# Allegro board scm.brd
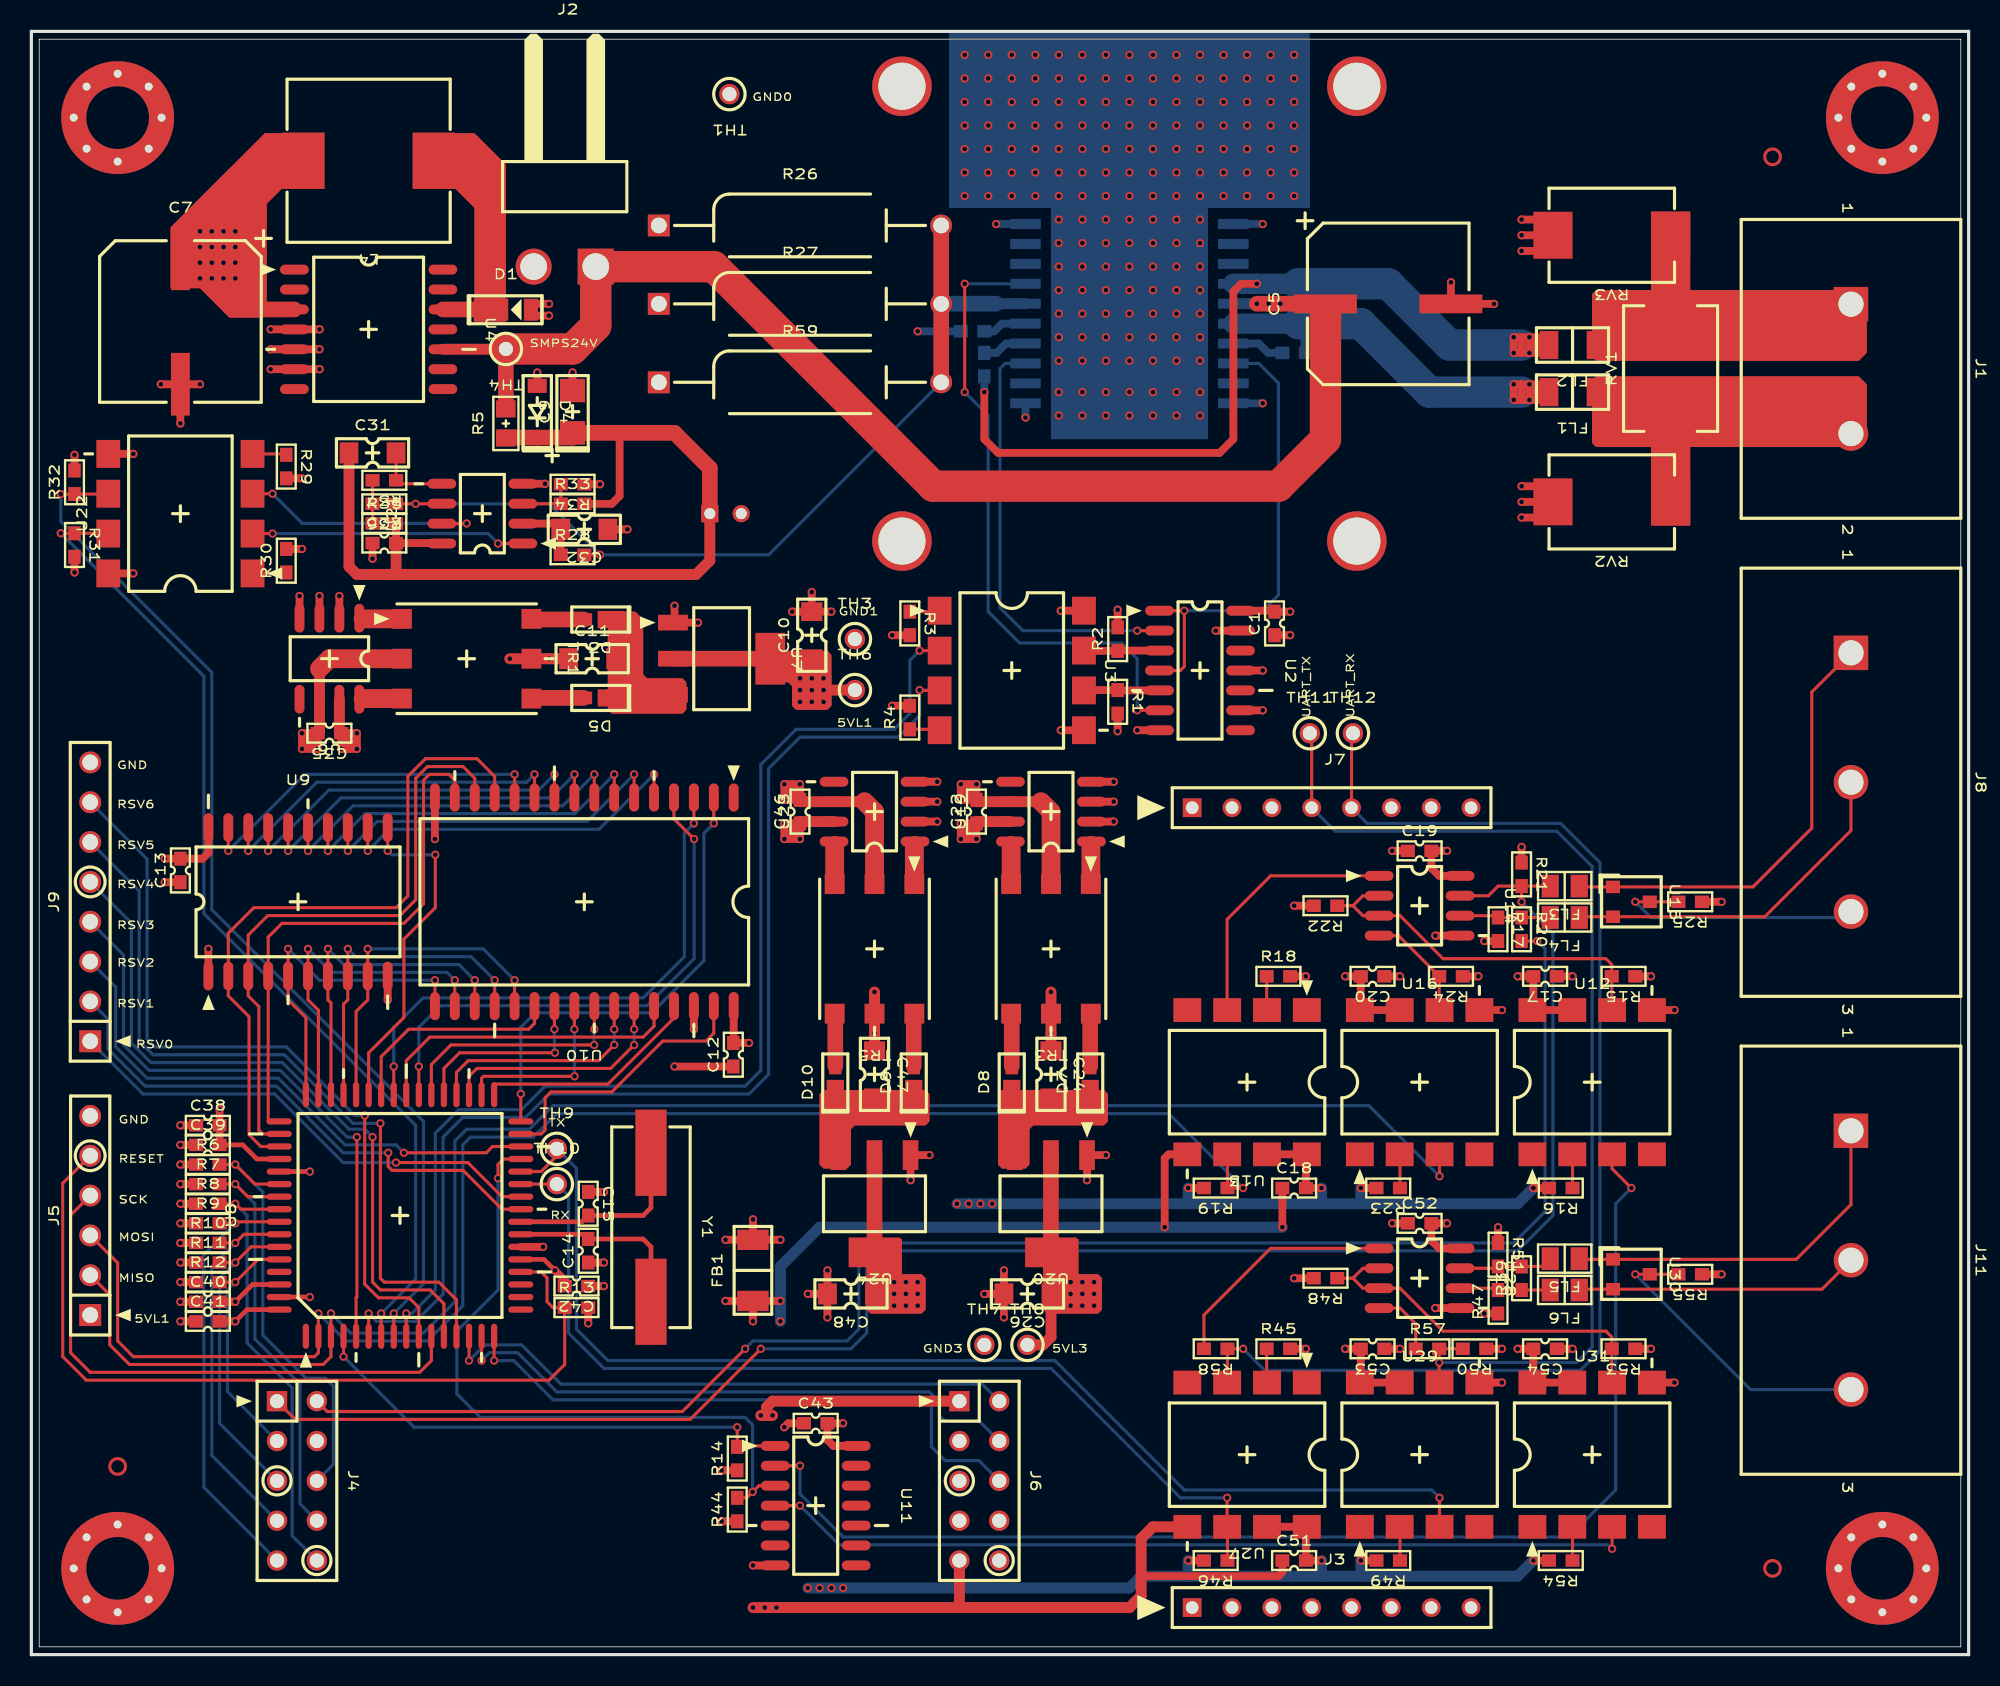
[diagram p0: board, top side]
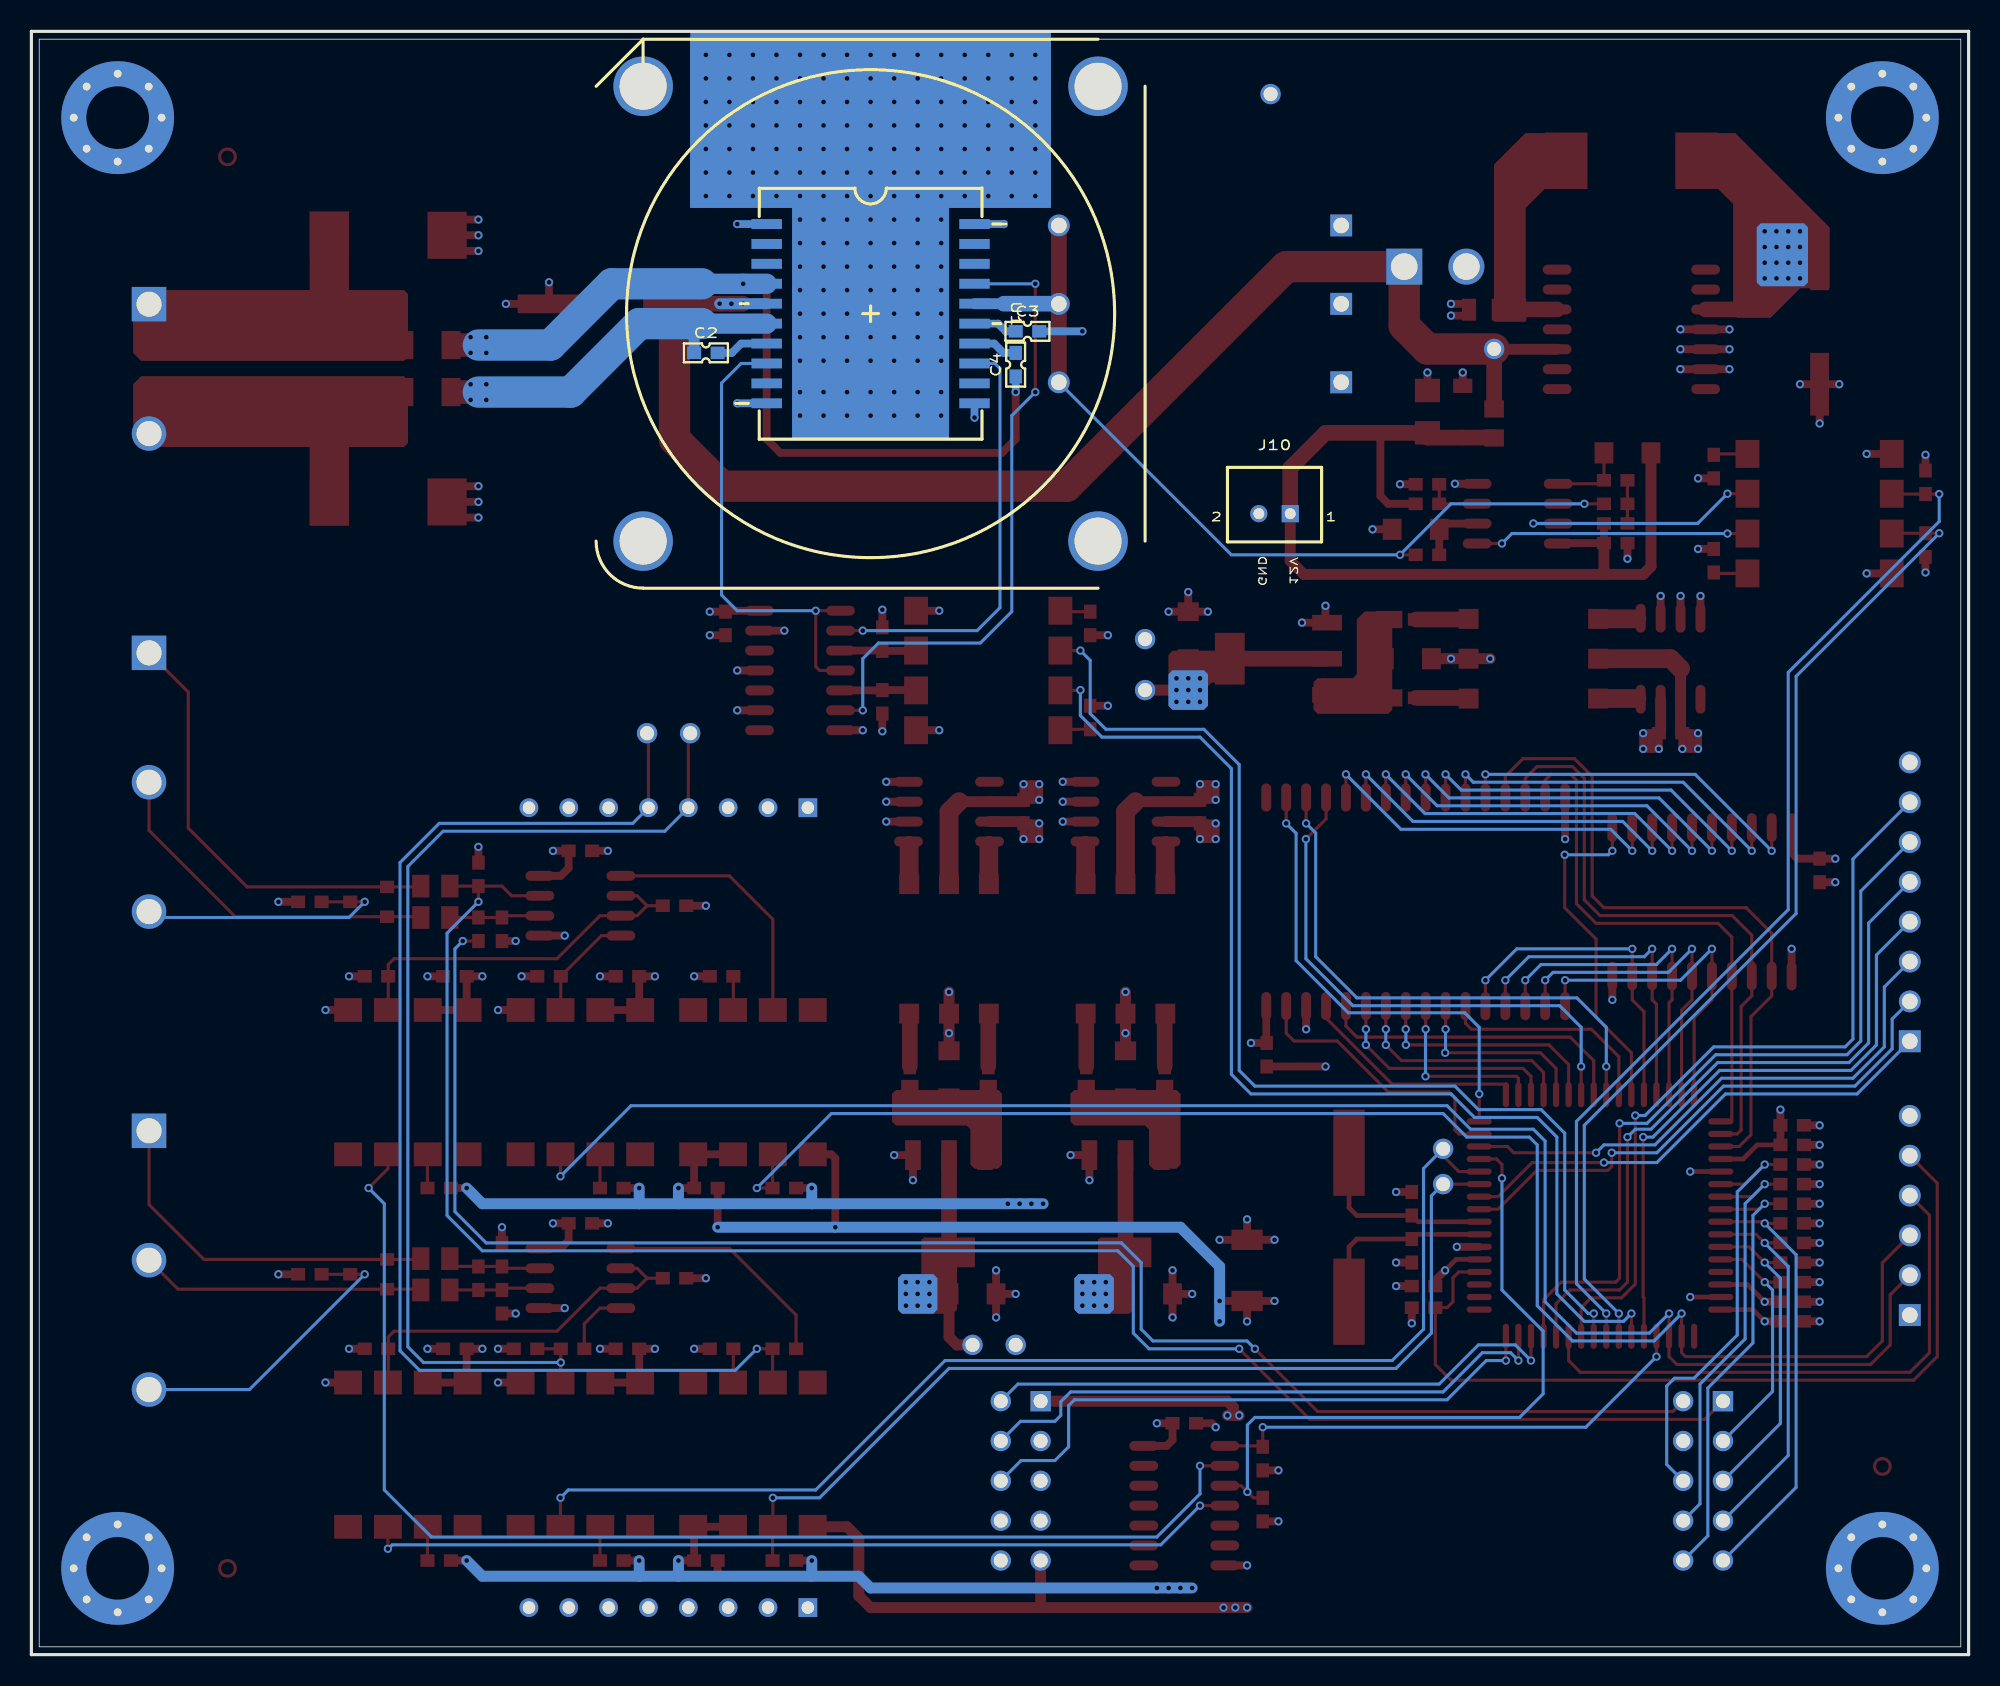
[diagram p1: board, bottom side, seen from below]

Outline 123.5 x 103.5 mm; copper layers: TOP, SIGNAL_2, SIGNAL_3, BOTTOM. Coordinates in mm from the lower left corner of the outline.
Outline path: 0,103.5 0,0 123.5,0 123.5,103.5 0,103.5 ; 0.5,103 123,103 123,0.5 0.5,0.5 0.5,103

## Placement (name value [footprint] x y rotation side)
C1  -  [CC1608]  79.25 65.75 90 top
C2  -  [CC1608]  80.5 83 180 bottom
C3  -  [CC1608]  60 84.38 180 bottom
C4  -  [CC1608]  60.75 82.25 90 bottom
C5  -  [CAP10D]  86.5 86.12 90 top
C7  -  [CAP10D]  9.5 85 0 top
C9  -  [TC3216]  34.5 79.25 90 top
C10  -  [CC3216]  49.75 65 90 top
C11  -  [CC3216]  35.75 63.5 0 top
C12  -  [CC1608]  44.75 38.25 90 top
C13  -  [CC1608]  9.5 50 90 top
C14  -  [CC1608]  35.5 25.75 90 top
C15  -  [CC1608]  35.5 28.75 270 top
C17  -  [CC1608]  96.5 43.25 180 top
C18  -  [CC1608]  80.5 29.75 0 top
C19  -  [CC1608]  88.5 51.25 0 top
C20  -  [CC1608]  85.5 43.25 180 top
C22  -  [CC1608]  60.25 53.75 90 top
C24  -  [CC3216]  65 37 270 top
C26  -  [CC3216]  63.5 23 180 top
C31  -  [CC3216]  21.75 76.62 0 top
C32  -  [CC3216]  35.25 71.75 180 top
C33  -  [CC1608]  22.5 70.88 0 top
C35  -  [CC1608]  19 58.75 180 top
C38  -  [CC1608]  11.25 33.75 0 top
C39  -  [CC1608]  11.25 32.5 0 top
C40  -  [CC1608]  11.25 22.5 0 top
C41  -  [CC1608]  11.25 21.25 0 top
C42  -  [CC1608]  34.75 23.5 180 top
C43  -  [CC1608]  50 14.75 0 top
C46  -  [CC1608]  49 53.75 90 top
C47  -  [CC3216]  53.75 37 270 top
C48  -  [CC3216]  52.25 23 180 top
C51  -  [CC1608]  80.5 6 0 top
C52  -  [CC1608]  88.5 27.5 0 top
C53  -  [CC1608]  85.5 19.5 180 top
C54  -  [CC1608]  96.5 19.5 180 top
D1  -  [POWERDI123]  30.25 85.75 0 top
D3  -  [MICROSMP]  36.25 66 180 top
D4  -  [SOD-123]  32.25 79.25 270 top
D5  -  [MICROSMP]  36.25 61 180 top
D7  -  [MICROSMP]  67.5 36.5 90 top
D8  -  [MICROSMP]  62.5 36.5 90 top
D9  -  [MICROSMP]  56.25 36.5 90 top
D10  -  [MICROSMP]  51.25 36.5 90 top
FB1  -  [BEAD4516]  46 24.5 90 top
FL1  -  [BEAD3216]  98.25 80.5 180 top
FL2  -  [BEAD3216]  98.25 83.5 180 top
FL3  -  [BEAD2012]  97.75 49 180 top
FL4  -  [BEAD2012]  97.75 47 180 top
FL5  -  [BEAD2012]  97.75 25.25 180 top
FL6  -  [BEAD2012]  97.75 23.25 180 top
J1  -  [OSTYK41202030]  116 81.98 270 top
J2  -  [A3961-WR02]  34 88.5 0 top
J3  -  [76341-308LF]  74 3 0 top
J4  -  [76342-305LF]  16.93 11.08 270 top
J5  -  [HEADER6_2_5MM_S]  3.75 28 90 top
J6  -  [76342-305LF]  60.43 11.08 270 top
J7  -  [76341-308LF]  74 54 0 top
J8  -  [OSTYK41203030]  116 55.62 270 top
J9  -  [HEADER8]  3.75 48 90 top
J10  -  [A2001-WV02]  44.25 72.75 180 bottom
J11  -  [OSTYK41203030]  116 25.15 270 top
L4  -  [B82464A4]  21.5 95.25 180 top
MH1  -  [MHOLE3_0]  5.5 98 0 top
MH2  -  [MHOLE3_0]  118 98 0 top
MH3  -  [MHOLE3_0]  5.5 5.5 0 top
MH4  -  [MHOLE3_0]  118 5.5 0 top
NOREF  -  []  5.5 12 0 top
NOREF#2  -  []  111 95.5 0 top
NOREF#3  -  []  111 5.5 0 top
R1  -  [RC1608]  69.25 60.75 270 top
R2  -  [RC1608]  69.25 64.75 90 top
R3  -  [RC1608]  56 65.75 270 top
R4  -  [RC1608]  56 59.75 90 top
R5  -  [RC2012]  30.25 78.5 90 top
R6  -  [RC1608]  11.25 31.25 0 top
R7  -  [RC1608]  11.25 30 0 top
R8  -  [RC1608]  11.25 28.75 0 top
R9  -  [RC1608]  11.25 27.5 0 top
R10  -  [RC1608]  11.25 26.25 0 top
R11  -  [RC1608]  11.25 25 0 top
R12  -  [RC1608]  11.25 23.75 0 top
R13  -  [RC1608]  34.75 22.12 0 top
R14  -  [RC1608]  45 12.5 90 top
R15  -  [RC1608]  101.5 43.25 180 top
R16  -  [RC1608]  97.5 29.75 180 top
R17  -  [RC1608]  93.5 46.25 270 top
R18  -  [RC1608]  79.5 43.25 0 top
R19  -  [RC1608]  75.5 29.75 180 top
R20  -  [RC1608]  95 46.25 270 top
R21  -  [RC1608]  95 49.75 270 top
R22  -  [RC1608]  82.5 47.75 180 top
R23  -  [RC1608]  86.5 29.75 180 top
R24  -  [RC1608]  90.5 43.25 180 top
R25  -  [RC1608]  105.75 48 180 top
R26  -  [MOR-1W]  49 91.12 0 top
R27  -  [MOR-1W]  49 86.12 0 top
R28  -  [RC1608]  34.5 70.12 0 top
R29  -  [RC1608]  16.25 75.75 270 top
R30  -  [RC1608]  16.25 69.75 90 top
R31  -  [RC1608]  2.75 70.75 270 top
R32  -  [RC1608]  2.75 74.75 90 top
R33  -  [RC1608]  34.5 73.38 0 top
R34  -  [RC1608]  34.5 74.62 180 top
R35  -  [RC1608]  22.5 72.12 0 top
R36  -  [RC1608]  22.5 73.38 180 top
R37  -  [RC1608]  22.5 74.88 180 top
R39  -  [RC1608]  95 24 90 top
R44  -  [RC1608]  45 9.25 90 top
R45  -  [RC1608]  79.5 19.5 0 top
R46  -  [RC1608]  75.5 6 180 top
R47  -  [RC1608]  93.5 22.5 90 top
R48  -  [RC1608]  82.5 24 180 top
R49  -  [RC1608]  86.5 6 180 top
R50  -  [RC1608]  92 19.5 180 top
R51  -  [RC1608]  93.5 25.5 270 top
R53  -  [RC1608]  101.5 19.5 180 top
R54  -  [RC1608]  97.5 6 180 top
R55  -  [RC1608]  105.75 24.25 180 top
R57  -  [RC1608]  89 19.5 0 top
R58  -  [RC1608]  75.5 19.5 180 top
R59  -  [MOR-1W]  49 81.12 0 top
RV1  -  [ERZVF2M]  104.5 82 90 top
RV2  -  [ERZVF2M]  100.75 73.5 180 top
RV3  -  [ERZVF2M]  100.75 90.5 180 top
TH1  -  [TP0_9]  44.5 99.5 180 top
TH3  -  [TP0_9]  52.5 64.75 0 top
TH4  -  [TP0_9]  30.25 83.25 180 top
TH6  -  [TP0_9]  52.5 61.5 0 top
TH7  -  [TP0_9]  60.75 19.75 0 top
TH8  -  [TP0_9]  63.5 19.75 0 top
TH9  -  [TP0_9]  33.5 32.25 0 top
TH10  -  [TP0_9]  33.5 30 0 top
TH11  -  [TP0_9]  81.5 58.75 0 top
TH12  -  [TP0_9]  84.25 58.75 0 top
TR1  -  [Q4470-CL]  27.75 63.5 270 top
TR3  -  [Q4470-CL]  65 45 180 top
TR5  -  [Q4470-CL]  53.75 45 180 top
U1  -  [POWERSO20]  70 85.5 270 bottom
U2  -  [SOP14_3_9_6_1_27]  74.5 62.75 270 top
U3  -  [SMD-8]  62.5 62.75 270 top
U4  -  [SOP14_7_5_10_3_1_27]  21.5 84.5 270 top
U6  -  [SOP8_3_9_6_1_27]  19 63.5 180 top
U7  -  [SOT-223]  44 63.5 270 top
U8  -  [QFP64_14_16_0_8]  23.5 28 90 top
U9  -  [SOP20_7_5_10_3_1_27]  17 48 0 top
U10  -  [SOP32_11_4_14_1_1_27]  35.25 48 180 top
U11  -  [SOP14_3_9_6_1_27]  50 9.5 270 top
U12  -  [SMD-8]  99.5 36.5 0 top
U13  -  [SMD-8]  77.5 36.5 180 top
U14  -  [SOP8_3_9_6_1_27]  88.5 47.75 270 top
U15  -  [SOT-23]  102 48 270 top
U16  -  [SMD-8]  88.5 36.5 0 top
U19  -  [SOP8_3_9_6_1_27]  65 53.75 90 top
U20  -  [SOT-223]  65 28.75 180 top
U21  -  [SOP8_3_9_6_1_27]  28.75 72.75 90 top
U22  -  [SMD-8]  9.5 72.75 90 top
U23  -  [SOP8_3_9_6_1_27]  53.75 53.75 90 top
U24  -  [SOT-223]  53.75 28.75 180 top
U27  -  [SMD-8]  77.5 12.75 180 top
U28  -  [SOP8_3_9_6_1_27]  88.5 24 270 top
U29  -  [SMD-8]  88.5 12.75 0 top
U30  -  [SOT-23]  102 24.25 270 top
U31  -  [SMD-8]  99.5 12.75 0 top
U32  -  [FAN35MM]  70 85.5 180 bottom
Y1  -  [SX-1]  39.5 27.25 270 top

## Library data of the parts
C1 C12 C13 C17-C20 C22 C33 C35 C38-C43 C46 C51-C54 = 0_1U_0603: alternate symbols: (B:CC1608_ALT)
C2 C4 = 10N_0603: alternate symbols: (B:CC1608_ALT)
C3 = 220N_0603: alternate symbols: (B:CC1608_ALT)
C5 C7 = EEE-1VA331P: alternate symbols: (B:CAP10D_ALT)
C9 = TANTAL_6_8UF_3216: alternate symbols: (B:TC3216_ALT)
C10 C11 C24 C26 C32 C47 C48 = 10U_1206: alternate symbols: (B:CC3216_ALT)
C14 C15 = 15P_0603: alternate symbols: (B:CC1608_ALT)
C31 = TCSCS1C685MAAR: alternate symbols: (B:CC3216_ALT)
D1 = DFLS160-7: alternate symbols: (B:POWERDI123_ALT)
D3 D5 D7-D10 = MSS1P2L-M3_89A: alternate symbols: (B:MICROSMP_ALT)
D4 = MMSZ4699T1G_12V: alternate symbols: (B:SOD-123_ALT)
FB1 = BLM41PG750SN1_DNI: alternate symbols: (B:BEAD4516_ALT)
FL1 FL2 = BLM31PG601SN1L: alternate symbols: (B:BEAD3216_ALT)
FL3-FL6 = MMZ2012R150A: alternate symbols: (B:BEAD2012_ALT)
J1 = OSTYK41202030: alternate symbols: (B:OSTYK41202030_ALT)
J2 = 09-65-2028: alternate symbols: (B:A3961-WR02_ALT)
J3 J7 = 76341-308LF_2_54MM_SOCKET: alternate symbols: (B:76341-308LF_ALT)
J4 J6 = 76342-305LF: alternate symbols: (B:76342-305LF_ALT)
J5 = PH01_2_54_-SS40P-11_5MM: alternate symbols: (B:HEADER6_2_5MM_S_ALT)
J8 J11 = OSTYK41203030: alternate symbols: (B:OSTYK41203030_ALT)
J9 = HEADER_2_54MM_DNI: alternate symbols: (B:HEADER8_ALT)
J10 = A2001-WV02_PITCH_2MM: alternate symbols: (B:A2001-WV02_ALT)
L4 = B82464A4474K: alternate symbols: (B:B82464A4_ALT)
MH1-MH4 = HOLE_MOUNT: alternate symbols: (B:MHOLE3_0_ALT)
R1 R2 R15 R17 R19 R21 R22 R24 R31 R32 R46-R48 R50 R51 R53 = 4_7K_0603: alternate symbols: (B:RC1608_ALT)
R3 R4 R16 R18 R23 R29 R30 R45 R49 R54 = 470_0603: alternate symbols: (B:RC1608_ALT)
R5 = 2_7K_0805: alternate symbols: (B:RC2012_ALT)
R6-R14 R28 R37 R44 = 10K_0603: alternate symbols: (B:RC1608_ALT)
R20 R39 = 120_0603: alternate symbols: (B:RC1608_ALT)
R25 R55 R57 R58 = 0_0603: alternate symbols: (B:RC1608_ALT)
R26 R27 R59 = MOR_1W_5__1OHM: alternate symbols: (B:MOR-1W_ALT)
R33 = 16K_0603: alternate symbols: (B:RC1608_ALT)
R34 = 1K_0603: alternate symbols: (B:RC1608_ALT)
R35 = 47K_0603: alternate symbols: (B:RC1608_ALT)
R36 = 200_0603: alternate symbols: (B:RC1608_ALT)
RV1-RV3 = ERZVF2M470: alternate symbols: (B:ERZVF2M_ALT)
TH1 TH3 TH7 = GND: alternate symbols: (B:TP0_9_ALT)
TH4 = SMPS24V: alternate symbols: (B:TP0_9_ALT)
TH6 = 5VL1: alternate symbols: (B:TP0_9_ALT)
TH8 = 5VL3: alternate symbols: (B:TP0_9_ALT)
TH9 TH11 = TX: alternate symbols: (B:TP0_9_ALT)
TH10 TH12 = RX: alternate symbols: (B:TP0_9_ALT)
TR1 TR3 TR5 = Q4470-CL: alternate symbols: (B:Q4470-CL_ALT)
U1 = L6201PS_POWERSO20: alternate symbols: (B:POWERSO20_ALT)
U2 U11 = MM74HC04M: alternate symbols: (B:SOP14_3_9_6_1_27_ALT)
U3 U22 = HCPL2630S: alternate symbols: (B:SMD-8_ALT)
U4 = LM2574HVM-5_0: alternate symbols: (B:SOP14_7_5_10_3_1_27_ALT)
U6 U19 U23 = MAX253ESA: alternate symbols: (B:SOP8_3_9_6_1_27_ALT)
U7 U20 U24 = LM1117IMPX-5_0: alternate symbols: (B:SOT-223_ALT)
U8 = ATMEGA128-16AU: alternate symbols: (B:QFP64_14_16_0_8_ALT)
U9 = SN74HC573ADW: alternate symbols: (B:SOP20_7_5_10_3_1_27_ALT)
U10 = R1LP0108ESP-7SI_B0: alternate symbols: (B:SOP32_11_4_14_1_1_27_ALT)
U12 U13 U16 U27 U29 U31 = 6N137S: alternate symbols: (B:SMD-8_ALT)
U14 U28 = SN65176BD: alternate symbols: (B:SOP8_3_9_6_1_27_ALT)
U15 U30 = SM712-TP: alternate symbols: (B:SOT-23_ALT)
U21 = LM2903D_SOIC: alternate symbols: (B:SOP8_3_9_6_1_27_ALT)
U32 = FAN35M: alternate symbols: (B:FAN35MM_ALT)
Y1 = SX-1_8MHZ_: alternate symbols: (B:SX-1_ALT)

## Footprints (pads in the part's own frame, mm; a bottom-side part is the same pattern mirrored in y, then rotated)
76341-308LF
  rect 1.2x1.2 hole 0.8: 1(0,0)
  round 1.2 hole 0.8: 2(2.54,0) 3(5.08,0) 4(7.62,0) 5(10.16,0) 6(12.7,0) 7(15.24,0) 8(17.78,0)
76342-305LF
  rect 1.3x1.3 hole 0.9: 1(-5.08,-1.27)
  round 1.3 hole 0.9: 2(-5.08,1.27) 3(-2.54,-1.27) 4(-2.54,1.27) 5(0,-1.27) 6(0,1.27) 7(2.54,-1.27) 8(2.54,1.27) 9(5.08,-1.27) 10(5.08,1.27)
A2001-WV02
  rect 1.1x1.1 hole 0.7: 1(1,0)
  round 1.1 hole 0.7: 2(-1,0)
A3961-WR02
  rect 2.3x2.3 hole 1.7: 1(1.98,0)
  round 2.3 hole 1.7: 2(-1.98,0)
B82464A4
  rect 2.7x3.6 smd: 1(-4.15,0) 2(4.15,0)
BEAD2012
  rect 1.1x1.45 smd: 1(-0.925,0) 2(0.925,0)
BEAD3216
  rect 1.2x1.8 smd: 1(-1.5,0) 2(1.5,0)
BEAD4516
  rect 1.3x2 smd: 1(-1.95,0) 2(1.95,0)
CAP10D
  rect 1.2x4 smd: 1(0,4) 2(0,-4)
CC1608
  rect 0.9x0.8 smd: 1(-0.75,0) 2(0.75,0)
CC3216
  rect 1.2x1.35 smd: 1(-1.5,0) 2(1.5,0)
ERZVF2M
  rect 2.5x3 smd: 1(-3.75,0) 2(3.75,0)
FAN35MM
  round 3.8 hole 3: 1(-14.5,14.5) 2(14.5,14.5) 3(14.5,-14.5) 4(-14.5,-14.5)
HEADER6_2_5MM_S
  rect 1.4x1.4 hole 1: 1(-6.35,0)
  round 1.4 hole 1: 2(-3.81,0) 3(-1.27,0) 4(1.27,0) 5(3.81,0) 6(6.35,0)
HEADER8
  rect 1.4x1.4 hole 1: 1(-8.89,0)
  round 1.4 hole 1: 2(-6.35,0) 3(-3.81,0) 4(-1.27,0) 5(1.27,0) 6(3.81,0) 7(6.35,0) 8(8.89,0)
MHOLE3_0
  round 0.9 hole 0.5: 1(2.8,0) 2(1.98,1.98) 3(0,2.8) 4(-1.98,1.98) 5(-2.8,0) 6(-1.98,-1.98) 7(0,-2.8) 8(1.98,-1.98)
MICROSMP
  rect 1.7x1.1 smd: 1(-0.7,0)
  rect 1.05x0.8 smd: 2(1.025,0)
MOR-1W
  rect 1.4x1.4 hole 1: 1(-9,0)
  round 1.4 hole 1: 2(9,0)
OSTYK41202030
  rect 2.2x2.2 hole 1.6: 1(-4.125,0)
  round 2.2 hole 1.6: 2(4.125,0)
OSTYK41203030
  rect 2.2x2.2 hole 1.6: 1(-8.25,0)
  round 2.2 hole 1.6: 2(0,0) 3(8.25,0)
POWERDI123
  rect 0.9x1.4 smd: 1(1.6,0)
  rect 2.2x1.4 smd: 2(-0.95,0)
POWERSO20
  rect 0.635x1.95 smd: 1(-5.715,-6.625) 2(-4.445,-6.625) 3(-3.175,-6.625) 4(-1.905,-6.625) 5(-0.635,-6.625) 6(0.635,-6.625) 7(1.905,-6.625) 8(3.175,-6.625) 9(4.445,-6.625) 10(5.715,-6.625) 11(5.715,6.625) 12(4.445,6.625) 13(3.175,6.625) 14(1.905,6.625) 15(0.635,6.625) 16(-0.635,6.625) 17(-1.905,6.625) 18(-3.175,6.625) 19(-4.445,6.625) 20(-5.715,6.625)
Q4470-CL
  rect 1.27x1.27 smd: 1(-2.54,-4.13) 2(0,-4.13) 3(2.54,-4.13) 4(2.54,4.13) 5(0,4.13) 6(-2.54,4.13)
QFP64_14_16_0_8
  oval 1.6x0.4 smd: 1(-7.7,6) 2(-7.7,5.2) 3(-7.7,4.4) 4(-7.7,3.6) 5(-7.7,2.8) 6(-7.7,2) 7(-7.7,1.2) 8(-7.7,0.4) 9(-7.7,-0.4) 10(-7.7,-1.2) 11(-7.7,-2) 12(-7.7,-2.8) 13(-7.7,-3.6) 14(-7.7,-4.4) 15(-7.7,-5.2) 16(-7.7,-6) 33(7.7,-6) 34(7.7,-5.2) 35(7.7,-4.4) 36(7.7,-3.6) 37(7.7,-2.8) 38(7.7,-2) 39(7.7,-1.2) 40(7.7,-0.4) 41(7.7,0.4) 42(7.7,1.2) 43(7.7,2) 44(7.7,2.8) 45(7.7,3.6) 46(7.7,4.4) 47(7.7,5.2) 48(7.7,6)
  oval 0.4x1.6 smd: 17(-6,-7.7) 18(-5.2,-7.7) 19(-4.4,-7.7) 20(-3.6,-7.7) 21(-2.8,-7.7) 22(-2,-7.7) 23(-1.2,-7.7) 24(-0.4,-7.7) 25(0.4,-7.7) 26(1.2,-7.7) 27(2,-7.7) 28(2.8,-7.7) 29(3.6,-7.7) 30(4.4,-7.7) 31(5.2,-7.7) 32(6,-7.7) 49(6,7.7) 50(5.2,7.7) 51(4.4,7.7) 52(3.6,7.7) 53(2.8,7.7) 54(2,7.7) 55(1.2,7.7) 56(0.4,7.7) 57(-0.4,7.7) 58(-1.2,7.7) 59(-2,7.7) 60(-2.8,7.7) 61(-3.6,7.7) 62(-4.4,7.7) 63(-5.2,7.7) 64(-6,7.7)
RC1608
  rect 0.9x0.8 smd: 1(-0.75,0) 2(0.75,0)
RC2012
  rect 1.1x1.25 smd: 1(-0.925,0) 2(0.925,0)
SMD-8
  rect 1.78x1.52 smd: 1(-3.81,-4.6) 2(-1.27,-4.6) 3(1.27,-4.6) 4(3.81,-4.6) 5(3.81,4.6) 6(1.27,4.6) 7(-1.27,4.6) 8(-3.81,4.6)
SOD-123
  rect 0.91x1.22 smd: 1(-1.65,0) 2(1.65,0)
SOP8_3_9_6_1_27
  oval 0.635x1.835 smd: 1(-1.905,-2.583) 2(-0.635,-2.583) 3(0.635,-2.583) 4(1.905,-2.583) 5(1.905,2.583) 6(0.635,2.583) 7(-0.635,2.583) 8(-1.905,2.583)
SOP14_3_9_6_1_27
  oval 0.635x1.835 smd: 1(-3.81,-2.583) 2(-2.54,-2.583) 3(-1.27,-2.583) 4(0,-2.583) 5(1.27,-2.583) 6(2.54,-2.583) 7(3.81,-2.583) 8(3.81,2.583) 9(2.54,2.583) 10(1.27,2.583) 11(0,2.583) 12(-1.27,2.583) 13(-2.54,2.583) 14(-3.81,2.583)
SOP14_7_5_10_3_1_27
  oval 0.635x1.835 smd: 1(-3.81,-4.732) 2(-2.54,-4.732) 3(-1.27,-4.732) 4(0,-4.732) 5(1.27,-4.732) 6(2.54,-4.732) 7(3.81,-4.732) 8(3.81,4.732) 9(2.54,4.732) 10(1.27,4.732) 11(0,4.732) 12(-1.27,4.732) 13(-2.54,4.732) 14(-3.81,4.732)
SOP20_7_5_10_3_1_27
  oval 0.635x1.835 smd: 1(-5.715,-4.732) 2(-4.445,-4.732) 3(-3.175,-4.732) 4(-1.905,-4.732) 5(-0.635,-4.732) 6(0.635,-4.732) 7(1.905,-4.732) 8(3.175,-4.732) 9(4.445,-4.732) 10(5.715,-4.732) 11(5.715,4.732) 12(4.445,4.732) 13(3.175,4.732) 14(1.905,4.732) 15(0.635,4.732) 16(-0.635,4.732) 17(-1.905,4.732) 18(-3.175,4.732) 19(-4.445,4.732) 20(-5.715,4.732)
SOP32_11_4_14_1_1_27
  oval 0.635x1.8 smd: 1(-9.525,-6.65) 2(-8.255,-6.65) 3(-6.985,-6.65) 4(-5.715,-6.65) 5(-4.445,-6.65) 6(-3.175,-6.65) 7(-1.905,-6.65) 8(-0.635,-6.65) 9(0.635,-6.65) 10(1.905,-6.65) 11(3.175,-6.65) 12(4.445,-6.65) 13(5.715,-6.65) 14(6.985,-6.65) 15(8.255,-6.65) 16(9.525,-6.65) 17(9.525,6.65) 18(8.255,6.65) 19(6.985,6.65) 20(5.715,6.65) 21(4.445,6.65) 22(3.175,6.65) 23(1.905,6.65) 24(0.635,6.65) 25(-0.635,6.65) 26(-1.905,6.65) 27(-3.175,6.65) 28(-4.445,6.65) 29(-5.715,6.65) 30(-6.985,6.65) 31(-8.255,6.65) 32(-9.525,6.65)
SOT-23
  rect 0.8x0.9 smd: 1(-0.95,-1.175) 2(0.95,-1.175) 3(0,1.175)
SOT-223
  rect 1x1.9 smd: 1(-2.3,-3.1) 2(0,-3.1) 3(2.3,-3.1)
  rect 3.3x1.9 smd: 4(0,3.1)
SX-1
  rect 5.5x2 smd: 1(-4.75,0) 2(4.75,0)
TC3216
  rect 1.5x1.6 smd: 1(-1.35,0) 2(1.35,0)
TP0_9
  round 1.3 hole 0.9: 1(0,0)

## Nets
5VL1: C10.1 C12.2 C13.2 C18.2 C38.2 C39.2 C40.2 C41.2 C42.2 C43.2 C51.2 J5.1 J6.1 R3.2 R4.2 R6.1 R7.1 R8.1 R9.1 R10.1 R11.1 R12.1 R13.2 R16.2 R19.2 R23.2 R31.2 R32.2 R46.2 R49.2 R54.2 TH6.1 U7.2 U7.4 U8.21 U8.52 U8.62 U8.64 U9.20 U10.30 U10.32 U11.14 U13.7 U13.8 U22.8 U27.7 U27.8
5VL2: C48.1 C52.2 C53.2 C54.2 J3.3 J3.4 J3.5 R45.2 R47.1 R48.2 R50.1 R53.1 U24.2 U24.4 U28.8 U29.7 U29.8 U31.7 U31.8
5VL3: C17.2 C19.2 C20.2 C26.1 R15.1 R17.2 R18.2 R22.2 R24.1 TH8.1 U12.7 U12.8 U14.8 U16.7 U16.8 U20.2 U20.4
5VM: C1.2 C7.1 C22.2 C35.2 C46.2 L4.2 R1.2 R2.2 R29.2 R30.2 TR1.2 TR3.2 TR5.2 U2.14 U3.8 U4.3 U6.6 U19.6 U23.6
12VM: C9.1 C31.1 C33.2 D4.2 J10.1 R5.1 R33.2 R35.2 U21.8
0: C1.1 C3.2 C5.2 C7.2 C9.2 C22.1 C32.1 C33.1 C35.1 C46.1 D1.1 D4.1 J2.2 J10.2 R26.1 R27.1 R34.1 R59.1 RV2.2 RV3.2 TH1.1 U1.1 U1.10 U1.11 U1.20 U2.7 U2.9 U2.11 U2.13 U3.5 U4.4 U4.5 U4.6 U6.2 U6.3 U6.4 U6.7 U19.2 U19.3 U19.4 U19.7 U21.4 U23.2 U23.3 U23.4 U23.7
1: C10.2 C11.1 C12.1 C13.1 C14.1 C15.1 C18.1 C38.1 C39.1 C40.1 C41.1 C42.1 C43.1 C51.1 FB1.1 J5.6 J6.9 J9.8 R14.1 R44.1 TH3.1 TR1.5 U7.1 U8.22 U8.53 U8.63 U9.1 U9.10 U10.16 U11.7 U13.5 U22.5 U27.5
2: C47.1 C48.2 C52.1 C53.1 C54.1 FB1.2 J3.1 J3.2 J3.6 J7.1 J7.2 J7.3 J7.6 R51.1 R55.1 TR5.5 U24.1 U28.5 U29.5 U31.5
3: C17.1 C19.1 C20.1 C24.1 C26.2 R21.1 R25.1 TH7.1 TR3.5 U12.5 U14.5 U16.5 U20.1
485_EN_LOCAL: R44.2 U8.29 U11.3
485_EN_MASTER: R14.2 U8.4 U11.1
485_RX_LOCAL: R58.2 U28.1
485_RX_MASTER: J5.3 R19.1 U8.2 U13.6
485_TERM_N: FL3.2 J4.1 R21.2 U14.7
485_TERM_P: J4.2 R20.2
485_TX_LOCAL: R57.1 U28.4
485_TX_MASTER: J5.2 U8.3 U16.3
A8: U8.35 U10.27
A9: U8.36 U10.26
A10: U8.37 U10.23
A11: U8.38 U10.25
A12: U8.39 U10.4
A13: U8.40 U10.28
A14: U8.41 U10.3
A15: U8.42 U10.22
CURRENT_SEN: R31.1 U8.7 U22.7
D0: U8.51 U9.2 U10.13
D1: U8.50 U9.3 U10.14
D2: U8.49 U9.4 U10.15
D3: U8.48 U9.5 U10.17
D4: U8.47 U9.6 U10.18
D5: U8.46 U9.7 U10.19
D6: U8.45 U9.8 U10.20
D7: U8.44 U9.9 U10.21
PLC_EN: U3.3 U8.6
PLC_RX: R32.1 U8.8 U22.6
PLC_TX: U3.2 U8.9
RESERVED0: J9.1 U8.26
RESERVED1: J9.2 U8.25
RESERVED2: J9.3 U8.30
RESERVED3: J9.4 U8.5
RESERVED4: J9.5 U8.12
RESERVED5: J9.6 U8.13
RESERVED6: J9.7 U8.10
RX: R46.1 TH10.1 U8.27 U27.6
SMPS24V: C5.1 J2.1 R5.2 TH4.1 U1.5 U4.10
TX: TH9.1 U8.28 U29.3
UART_RX: J7.5 R58.1 TH12.1 U27.3
UART_TX: J7.4 R50.2 R57.2 TH11.1 U29.6
N09389: D3.2 TR1.6
N09392: D5.2 TR1.4
N09528: C11.2 D3.1 D5.1 U7.3
N35390: U9.19 U10.12
N35393: U9.18 U10.11
N35399: U9.17 U10.10
N35402: U9.16 U10.9
N35405: U9.15 U10.8
N35408: U9.14 U10.7
N35411: U9.13 U10.6
N35414: U9.12 U10.5
N35443: U8.43 U9.11
N35464: U8.31 U10.31
N38547: U8.33 U10.29
N38727: U8.34 U10.24
N39169: U8.32 U10.2
N10841551: FL2.1 J1.1 RV1.2 RV3.1
N10842146: FL1.1 J1.2 RV1.1 RV2.1
N10844937: C2.1 FL1.2 U1.6
N10844940: C4.1 FL2.2 U1.4
N10846204: U1.8 U2.1 U2.4
N10847524: C2.2 U1.7
N10847531: C4.2 U1.14
N10852000: R1.1 U2.5 U3.6
N10855610: U1.13 U2.2
N10855613: U1.17 U2.6
N10855616: C3.1 U1.15
N10857224: D1.2 L4.1 U4.12
N10865568: R2.1 U2.3 U3.7
N10867072: R3.1 U3.1
N10870573: TR1.1 U6.1
N10870576: TR1.3 U6.8
N10877738: C14.2 U8.23 Y1.2
N10877750: C15.2 U8.24 Y1.1
N10878472: J5.5 R13.1 U8.20
N10878665: J5.4 U8.11
N10882240: D8.2 TR3.4
N10882264: C24.2 D7.1 D8.1 U20.3
N10882308: TR3.3 U19.8
N10882312: D7.2 TR3.6
N10882400: TR3.1 U19.1
N10895652: R24.2 U14.4 U16.6
N10895660: U13.3 U14.1
N10895700: R18.1 U13.2
N10895720: R15.2 R22.1 U12.6 U14.2 U14.3
N10895736: R23.1 U16.2
N10895740: J8.3 R25.2 U15.3
N10895768: FL4.2 R17.1 R20.1 U14.6
N10895776: FL3.1 J8.1 U15.1
N10895804: FL4.1 J8.2 U15.2
N10895892: R16.1 U12.2
N10899790: U11.2 U12.3
N10905190: J6.2 U8.14
N10905845: J6.4 U8.15
N10905855: J6.6 U8.16
N10912524: J4.3 R12.2 U8.60
N10912530: J4.5 R11.2 U8.59
N10912536: J4.7 R10.2 U8.58
N10912542: J4.9 R9.2 U8.57
N10912548: J4.10 R8.2 U8.56
N10912554: J4.8 R7.2 U8.55
N10912561: J4.6 R6.2 U8.54
N10952342: R4.1 U3.4
N11012209: U21.7 U22.3
N11012213: R29.1 U22.4
N11012385: R30.1 U22.1
N11012421: U21.1 U22.2
N11012477: R33.1 R34.2 U21.3
N11012557: R26.2 R27.2 R28.2 R36.1 R59.2 U1.16 U21.6
N11012561: C31.2 R37.1 U21.5
N11012633: R35.1 R36.2 R37.2
N11012693: C32.2 R28.1 U21.2
N11053368: U11.4 U31.3
N11053516: R48.1 R53.2 U28.2 U28.3 U31.6
N11053708: R45.1 U27.2
N11053936: R49.1 U29.2
N11054044: R54.1 U31.2
N11062693: D10.2 TR5.4
N11062701: C47.2 D9.1 D10.1 U24.3
N11062785: D9.2 TR5.6
N11062789: TR5.3 U23.8
N11062917: TR5.1 U23.1
N11075966: FL5.1 J11.1 U30.1
N11075998: J11.3 R55.2 U30.3
N11076018: FL6.2 R39.1 R47.2 U28.6
N11076244: FL6.1 J11.2 U30.2
N11076282: FL5.2 R39.2 R51.2 U28.7

Pads without a net: J3 7 8; J4 4; J6 3 5 7 8 10; J7 7 8; MH1 1 2 3 4 5 6 7 8; MH2 1 2 3 4 5 6 7 8; MH3 1 2 3 4 5 6 7 8; MH4 1 2 3 4 5 6 7 8; U1 2 3 9 12 18 19; U2 8 10 12; U4 1 2 7 8 9 11 13 14; U6 5; U8 1 17 18 19 61; U10 1; U11 5 6 8 9 10 11 12 13; U12 1 4; U13 1 4; U16 1 4; U19 5; U23 5; U27 1 4; U29 1 4; U31 1 4; U32 1 2 3 4

## Via types
v1: diameter 0.53, hole 0.3, TOP to BOTTOM, 519 vias

## Routing (per net, layer and track width the routed paths; a pad name or vN(x,y) marks a point on that pad's centre or on a via; arc(x,y) is an arc through that point)
5VL1: length 177.9
  TOP w0.3: U8.62 14.1,23.6 v1(13,22.5) ; U8.52 14.38,31.6 13.47,32.5 C39.2 ; v1(13,21.25) 13.75,22 U8.64 ; v1(33.38,24.5) 32.67,25.2 U8.21
  TOP w0.5: U10.30 v1(42.23,39.88) ; R8.1 v1(9.5,28.75) ; v1(82.25,29.75) C18.2 81.25,31.9 ; C42.2 34,23.88 v1(33.38,24.5) ; v1(12,34.75) C38.2 C39.2 ; R49.2 v1(84.75,6) ; U10.32 44.77,39 ; 44.77,39 v1(45.75,39) ; 44.77,39 C12.2 ; v1(51.75,14.75) C43.2 50.75,13.69 51.12,13.31 U11.14 ; R9.1 v1(9.5,27.5) ; U9.20 11.29,51.12 10.91,50.75 C13.2 v1(8.5,50.75) ; R6.1 v1(9.5,31.25) ; 81.25,8.15 C51.2 v1(82.25,6) ; 81.25,8.15 U27.7 ; 81.25,8.15 U27.8 ; R3.2 v1(54.88,65) ; R23.2 v1(84.75,29.75) ; C41.2 v1(13,21.25) ; R12.1 v1(9.5,23.75) ; R7.1 v1(9.5,30) ; R32.2 v1(2.75,76.5) ; R54.2 v1(95.75,6) ; R16.2 v1(95.75,29.75) ; R46.2 v1(73.75,6) ; 81.25,31.9 U13.8 ; 81.25,31.9 U13.7 ; R31.2 v1(2.75,69) ; R4.2 v1(54.88,60.5) ; R10.1 v1(9.5,26.25) ; R19.2 v1(73.75,29.75) ; R11.1 v1(9.5,25) ; R13.2 v1(35.5,21.12) ; C40.2 v1(13,22.5) ; U22.8 v1(6.5,68.94)
  TOP w0.7: v1(46.5,15.25) 46.88,15.25 ; 46.88,15.25 46.88,15.79 47.25,16.16 J6.1 ; 46.88,15.25 v1(47.25,15.25) ; v1(50.5,61.5) TH6.1
  TOP w1: U7.2 U7.4 C10.1
  BOTTOM w0.7: v1(82.25,6) 82.25,5 ; 82.25,5 84.75,5 ; 82.25,5 73.75,5 ; 73.75,28.75 v1(61.25,28.75) v1(60.5,28.75) v1(59.75,28.75) v1(59,28.75) ; 73.75,28.75 v1(73.75,29.75) ; 73.75,28.75 82.25,28.75 ; 84.75,5 v1(84.75,6) ; 84.75,5 94.75,5 v1(95.75,6) ; 73.75,5 70.75,5 70,4.25 v1(51.75,4.25) v1(51,4.25) v1(50.25,4.25) v1(49.5,4.25) ; 73.75,5 v1(73.75,6) ; v1(84.75,29.75) 84.75,28.75 ; 84.75,28.75 82.25,28.75 ; 84.75,28.75 94.75,28.75 v1(95.75,29.75) ; v1(82.25,29.75) 82.25,28.75
  vias: v1(49,62.25) v1(49,61.5) v1(49,60.75) v1(49.75,62.25) v1(49.75,61.5) v1(49.75,60.75) v1(50.5,62.25) v1(50.5,60.75)
5VL2: length 29.5
  TOP w0.5: U28.8 89.75,25.91 89.25,26.41 C52.2 v1(90.25,27.5) ; U29.7 84.75,17.35 ; 84.75,17.35 C53.2 v1(83.75,19.5) ; 84.75,17.35 U29.8 ; 95.75,17.35 C54.2 v1(94.75,19.5) ; 95.75,17.35 U31.8 ; 95.75,17.35 U31.7 ; R50.1 v1(93.75,19.5) ; R53.1 v1(103.25,19.5) ; R48.2 v1(80.5,24) ; R45.2 v1(81.25,19.5) ; R47.1 v1(92.62,21.75)
  TOP w1: C48.1 U24.4 U24.2
  vias: v1(55,23.75) v1(55,23) v1(55,22.25) v1(55.75,23.75) v1(55.75,23) v1(55.75,22.25) v1(56.5,23.75) v1(56.5,23) v1(56.5,22.25)
5VL3: length 32.9
  TOP w0.5: 84.75,41.1 C20.2 v1(83.75,43.25) ; 84.75,41.1 U16.7 ; 84.75,41.1 U16.8 ; R15.1 v1(103.25,43.25) ; 95.75,41.1 U12.8 ; 95.75,41.1 C17.2 v1(94.75,43.25) ; 95.75,41.1 U12.7 ; R17.2 v1(92.62,45.5) ; R18.2 v1(81.25,43.25) ; v1(90.25,51.25) C19.2 89.25,50.16 89.75,49.66 U14.8 ; R22.2 v1(80.5,47.75) ; R24.1 v1(92.25,43.25)
  TOP w0.7: 65,22 65,20.25 64.5,19.75 TH8.1
  TOP w1: U20.2 U20.4 C26.1
  vias: v1(66.25,23.75) v1(66.25,23) v1(66.25,22.25) v1(67,23.75) v1(67,23) v1(67,22.25) v1(67.75,23.75) v1(67.75,23) v1(67.75,22.25)
5VM: length 55.5
  TOP w0.5: 59.75,55.5 v1(59.25,55.5) v1(59.25,54.5) 59.75,54.5 ; 59.75,55.5 v1(60.25,55.5) C22.2 59.75,54.5 ; 59.75,55.5 59.75,54.5 ; 48.5,54.5 C46.2 v1(49,55.5) 48.5,55.5 ; 48.5,54.5 v1(48,54.5) v1(48,55.5) 48.5,55.5 ; 48.5,54.5 48.5,55.5 ; 17.75,58.75 v1(17.25,58.75) v1(17.25,57.75) 17.75,57.75 ; 17.75,58.75 17.75,57.75 ; 17.75,58.75 C35.2 ; U2.14 79.25,66.56 C1.2 v1(80.25,66.5) ; v1(69.25,66.62) R2.2 ; 17.75,57.75 v1(18.25,57.75) C35.2 ; R29.2 v1(17.25,75) ; R1.2 v1(69.25,58.88) ; U3.8 v1(65.62,66.56) ; 18.36,58.75 C35.2 ; R30.2 v1(17.25,70.5)
  TOP w0.7: 18.36,62.87 U6.6 18.36,58.75 ; 64.36,54.38 U19.6 60.25,54.38 C22.2 ; C46.2 49,54.38 U23.6 53.12,54.38
  TOP w1: 14.5,85.77 U4.3
  TOP w1.2: TR5.2 53.75,53.75 53.12,54.38 ; 18.36,62.87 19,63.5 TR1.2 ; 64.36,54.38 65,53.75 TR3.2
  vias: v1(10.75,90.75) v1(10.75,89.75) v1(10.75,88.75) v1(10.75,87.75) v1(11.5,90.75) v1(11.5,89.75) v1(11.5,88.75) v1(11.5,87.75) v1(12.25,90.75) v1(12.25,89.75) v1(12.25,88.75) v1(12.25,87.75) v1(13,90.75) v1(13,89.75) v1(13,88.75) v1(13,87.75)
12VM: length 63.7
  TOP w0.5: R35.2 C33.2 26.17,70.88 U21.8 ; 37.5,77.9 37.5,73.88 37,73.38 R33.2
  TOP w0.7: 23.25,68.88 20.75,68.88 20.25,69.38 C31.1 ; 23.25,68.88 C33.2 ; 23.25,68.88 42.38,68.88 43.25,69.75 J10.1
  TOP w1: R5.1 30.25,77.6 D4.2 34.5,77.6 C9.1 41,77.9 43.25,75.65 J10.1
0: length 96.4
  TOP w0.5: 48.5,52 v1(48,52) v1(48,53) 48.5,53 ; 48.5,52 v1(49,52) C46.1 48.5,53 ; 48.5,52 48.5,53 ; v1(32.25,81.75) D4.1 ; RV2.2 97,72.5 v1(95,72.5) ; RV2.2 v1(95,73.5) ; RV2.2 97,74.5 v1(95,74.5) ; C1.1 v1(80.25,65) ; U23.4 v1(57.75,55.66) ; U6.2 v1(19.64,67.5) ; U19.4 v1(69,55.66) ; v1(34.5,81.75) C9.2 ; v1(15.25,81.96) U4.6 v1(18.38,81.96) ; RV3.2 97,91.5 v1(95,91.5) ; RV3.2 v1(95,90.5) ; RV3.2 97,89.5 v1(95,89.5) ; C35.1 v1(19.75,57.75) 20.25,57.75 ; C35.1 20.25,58.75 ; C35.1 19.64,58.75 ; 20.25,57.75 20.25,58.75 ; 20.25,57.75 v1(20.75,57.75) v1(20.75,58.75) 20.25,58.75 ; C33.1 v1(21.75,69.88) ; U2.7 v1(70.5,58.94) ; v1(33,86.12) 31.85,86.12 D1.1 31.85,85.38 v1(33,85.38) ; 59.75,53 v1(59.25,53) v1(59.25,52) 59.75,52 ; 59.75,53 C22.1 v1(60.25,52) 59.75,52 ; 59.75,53 59.75,52 ; v1(65.62,58.94) U3.5 ; v1(18.38,84.5) U4.4 v1(15.25,84.5) ; C32.1 v1(38,71.75) ; C7.2 v1(9.5,78.5) ; C7.2 v1(10.75,81) ; C7.2 v1(8.25,81) ; v1(15.25,83.23) U4.5 v1(18.38,83.23) ; U23.2 v1(57.75,53.12) ; U19.2 v1(69,53.12) ; U6.3 v1(18.36,67.5) ; v1(78.5,62.75) U2.11 ; U19.3 v1(69,54.38) ; v1(93.25,86.12) C5.2 v1(90.5,87.5) ; U23.3 v1(57.75,54.38) ; v1(36.25,74.62) R34.1 ; U21.4 v1(32.75,74.66) ; U6.4 v1(17.09,67.5) ; v1(78.5,60.21) U2.9 ; U2.13 v1(75.5,65.29)
  TOP w0.7: C22.1 60.25,53.12 U19.7 ; C46.1 49,53.12 U23.7 ; 19.64,58.75 U6.7
  BOTTOM w0.5: C3.2 v1(56.5,84.38) ; U1.11 v1(63.38,78.88) ; v1(78.5,79.78) U1.10 ; U1.20 v1(61.5,91.22) ; U1.1 v1(78.5,91.22)
  vias: v1(59.5,102) v1(59.5,100.5) v1(59.5,99) v1(59.5,97.5) v1(59.5,96) v1(59.5,94.5) v1(59.5,93) v1(61,102) v1(61,100.5) v1(61,99) v1(61,97.5) v1(61,96) v1(61,94.5) v1(61,93) v1(62.5,102) v1(62.5,100.5) v1(62.5,99) v1(62.5,97.5) v1(62.5,96) v1(62.5,94.5) v1(62.5,93) v1(64,102) v1(64,100.5) v1(64,99) v1(64,97.5) v1(64,96) v1(64,94.5) v1(64,93) v1(65.5,102) v1(65.5,100.5) v1(65.5,99) v1(65.5,97.5) v1(65.5,96) v1(65.5,94.5) v1(65.5,93) v1(65.5,91.5) v1(65.5,90) v1(65.5,88.5) v1(65.5,87) v1(65.5,85.5) v1(65.5,84) v1(65.5,82.5) v1(65.5,80.5) v1(65.5,79) v1(67,102) v1(67,100.5) v1(67,99) v1(67,97.5) v1(67,96) v1(67,94.5) v1(67,93) v1(67,91.5) v1(67,90) v1(67,88.5) v1(67,87) v1(67,85.5) v1(67,84) v1(67,82.5) v1(67,80.5) v1(67,79) v1(68.5,102) v1(68.5,100.5) v1(68.5,99) v1(68.5,97.5) v1(68.5,96) v1(68.5,94.5) v1(68.5,93) v1(68.5,91.5) v1(68.5,90) v1(68.5,88.5) v1(68.5,87) v1(68.5,85.5) v1(68.5,84) v1(68.5,82.5) v1(68.5,80.5) v1(68.5,79) v1(70,102) v1(70,100.5) v1(70,99) v1(70,97.5) v1(70,96) v1(70,94.5) v1(70,93) v1(70,91.5) v1(70,90) v1(70,88.5) v1(70,87) v1(70,85.5) v1(70,84) v1(70,82.5) v1(70,80.5) v1(70,79) v1(71.5,102) v1(71.5,100.5) v1(71.5,99) v1(71.5,97.5) v1(71.5,96) v1(71.5,94.5) v1(71.5,93) v1(71.5,91.5) v1(71.5,90) v1(71.5,88.5) v1(71.5,87) v1(71.5,85.5) v1(71.5,84) v1(71.5,82.5) v1(71.5,80.5) v1(71.5,79) v1(73,102) v1(73,100.5) v1(73,99) v1(73,97.5) v1(73,96) v1(73,94.5) v1(73,93) v1(73,91.5) v1(73,90) v1(73,88.5) v1(73,87) v1(73,85.5) v1(73,84) v1(73,82.5) v1(73,80.5) v1(73,79) v1(74.5,102) v1(74.5,100.5) v1(74.5,99) v1(74.5,97.5) v1(74.5,96) v1(74.5,94.5) v1(74.5,93) v1(74.5,91.5) v1(74.5,90) v1(74.5,88.5) v1(74.5,87) v1(74.5,85.5) v1(74.5,84) v1(74.5,82.5) v1(74.5,80.5) v1(74.5,79) v1(76,102) v1(76,100.5) v1(76,99) v1(76,97.5) v1(76,96) v1(76,94.5) v1(76,93) v1(77.5,102) v1(77.5,100.5) v1(77.5,99) v1(77.5,97.5) v1(77.5,96) v1(77.5,94.5) v1(77.5,93) v1(79,102) v1(79,100.5) v1(79,99) v1(79,97.5) v1(79,96) v1(79,94.5) v1(79,93) v1(80.5,102) v1(80.5,100.5) v1(80.5,99) v1(80.5,97.5) v1(80.5,96) v1(80.5,94.5) v1(80.5,93)
1: length 134.1
  TOP w0.3: U8.63 v1(17.75,22.8) ; U8.53 v1(17.75,30.8)
  TOP w0.5: C14.1 v1(36.5,25) ; U7.1 41,65.8 ; 41,65.8 v1(41,66.88) ; 41,65.8 v1(42.5,65.8) ; U9.1 v1(11.29,45) ; FB1.1 v1(47.75,22.55) ; FB1.1 v1(46,21.25) ; FB1.1 v1(44.25,22.55) ; C18.1 v1(79.75,27.25) ; v1(48,14.5) 48.25,14.75 C43.1 ; U8.22 v1(32.62,26) ; U10.16 v1(25.73,52) ; R14.1 v1(44,11.75) ; U13.5 72.5,31.9 72.25,31.65 v1(72.25,27.25) ; C10.2 v1(48.5,66.5) ; C10.2 v1(49.75,67.75) ; C10.2 v1(51,66.5) ; 70.75,5 79.5,5 79.75,5.25 C51.1 ; C12.1 v1(41,37.5) ; C41.1 v1(9.5,21.25) ; C15.1 v1(36.5,29.5) ; U9.10 v1(22.71,41.75) ; C13.1 v1(8.5,49.25) ; U22.5 v1(6.5,76.56) ; C42.1 v1(36.5,23.5) ; U11.7 v1(46,5.69) ; C40.1 v1(9.5,22.5) ; C38.1 v1(9.5,33.75) ; R44.1 v1(44,8.5) ; C39.1 v1(9.5,32.5)
  TOP w0.7: U27.5 71.5,8.15 70.75,7.4 70.75,3.75 70,3 59.16,3 ; 59.16,3 J6.9 ; 59.16,3 v1(47.5,3) v1(46.75,3) v1(46,3) ; C11.1 v1(33,63.5) TR1.5 v1(30.5,63.5)
  BOTTOM w0.7: v1(79.75,27.25) v1(72.25,27.25) 50.25,27.25 47.75,24.75 v1(47.75,22.55) v1(47.75,21.25)
2: length 25.3
  TOP w0.5: C48.2 v1(50.75,24.5) ; C48.2 v1(49.5,23) ; C48.2 v1(50.75,21.5) ; FB1.2 v1(44.25,26.45) ; FB1.2 v1(46,27.75) ; FB1.2 v1(47.75,26.45) ; v1(57.25,31.85) U24.1 v1(56.05,30.25) ; C53.1 v1(87.25,19.5) ; R51.1 v1(93.5,27.25) ; U31.5 v1(104.75,17.35) ; R55.1 v1(107.75,24.25) ; U29.5 v1(93.75,17.35) ; C52.1 v1(86.75,27.5) ; C54.1 v1(98.25,19.5) ; U28.5 v1(89.5,22.09)
  TOP w0.7: v1(53.75,42.25) TR5.5 v1(53.75,39.62) C47.1
3: length 20.5
  TOP w0.5: C17.1 v1(98.25,43.25) ; C19.1 v1(86.75,51.25) ; R25.1 v1(107.75,48) ; U12.5 v1(104.75,41.1) ; C20.1 v1(87.25,43.25) ; v1(68.5,31.85) U20.1 v1(67.3,30.25) ; C26.2 v1(62,21.5) ; C26.2 v1(62,24.5) ; C26.2 v1(60.75,23) ; R21.1 v1(95,51.5) ; U16.5 v1(93.75,41.1) ; U14.5 v1(89.5,45.84)
  TOP w0.7: v1(65,42.25) TR3.5 v1(65,39.62) C24.1
485_EN_LOCAL: length 44
  TOP w0.2: U11.3 46.38,10.77 v1(45.98,10.38) 45.6,10 R44.2 ; U8.29 30.1,31.6 29.75,31.25 v1(29.75,30.38)
  BOTTOM w0.2: v1(45.98,10.38) 45.98,14.64 45.5,15.12 28.62,15.12 27.12,16.62 27.12,20.62 29.75,23.25 v1(29.75,30.38)
485_EN_MASTER: length 31.9
  TOP w0.2: U11.1 45,13.31 ; 45,13.31 v1(45,14.5) ; 45,13.31 R14.2 ; v1(19.9,19) U8.4
  BOTTOM w0.2: v1(45,14.5) 24.4,14.5 v1(19.9,19)
485_RX_LOCAL: length 15.1
  TOP w0.2: U28.1 79,25.91 74.75,21.66 R58.2
485_RX_MASTER: length 100.1
  TOP w0.2: v1(77.25,29.75) R19.1 76.25,31.9 U13.6 ; J5.3 5.5,24.98 5.5,20 6.5,19 18.05,19 18.3,19.25 U8.2 v1(18.3,21.75)
  BOTTOM w0.2: v1(18.3,21.75) 20.05,20 25.25,20 27.5,22.25 27.5,32.5 28,33 32,33 33.5,34.5 72.5,34.5 v1(77.25,29.75)
485_TERM_N: length 117.5
  TOP w0.2: v1(95,48) R21.2 ; R21.2 FL3.2 ; R21.2 93.5,49 92.89,48.38 U14.7 ; J4.1 16.82,15 42,15 v1(46.5,19.5)
  BOTTOM w0.2: v1(95,48) 97,46 97,28 94.75,25.75 54.25,25.75 53.25,24.75 53.25,20.5 52.25,19.5 v1(46.5,19.5)
485_TERM_P: length 104.8
  TOP w0.2: J4.2 18.86,15.5 41.5,15.5 v1(45.5,19.5) ; v1(96,45.5) R20.2
  BOTTOM w0.2: v1(45.5,19.5) 46,20 52,20 52.75,20.75 52.75,25 54,26.25 94.5,26.25 96.5,28.25 96.5,45 v1(96,45.5)
485_TX_LOCAL: length 4.3
  TOP w0.2: R57.1 88.25,21.09 87.25,22.09 U28.4
485_TX_MASTER: length 109
  TOP w0.2: U16.3 v1(89.77,30.5) ; v1(19.1,21.75) U8.3 19.1,19 18.6,18.5 6.25,18.5 5,19.75 5,22.94 J5.2
  BOTTOM w0.2: v1(89.77,30.5) 85.27,35 33.25,35 31.75,33.5 27.75,33.5 27,32.75 27,22.5 25,20.5 20.35,20.5 v1(19.1,21.75)
A8: length 15
  TOP w0.2: v1(38.42,38.88) 36.92,37.38 28.4,37.38 27.9,36.88 U8.35 ; U10.27 v1(38.42,39.88)
  BOTTOM w0.2: v1(38.42,39.88) v1(38.42,38.88)
A9: length 14.7
  TOP w0.2: v1(37.16,38.88) 36.16,37.88 27.85,37.88 27.1,37.12 U8.36 ; U10.26 v1(37.16,39.88)
  BOTTOM w0.2: v1(37.16,39.88) v1(37.16,38.88)
A10: length 12.2
  TOP w0.2: v1(33.38,38.38) 27.3,38.38 26.3,37.38 U8.37 ; U10.23 v1(33.34,39.88)
  BOTTOM w0.2: v1(33.34,39.88) 33.34,38.38 v1(33.38,38.38)
A11: length 15.3
  TOP w0.2: U8.38 25.5,37.62 26.75,38.88 v1(35.88,38.88) ; U10.25 v1(35.88,39.88)
  BOTTOM w0.2: v1(35.88,39.88) 35.88,39.88 v1(35.88,38.88)
A12: length 34.5
  TOP w0.2: v1(24.7,37.5) U8.39 ; U10.4 40.97,53.28 v1(42.25,52)
  BOTTOM w0.2: v1(42.25,52) 42.25,44.38 39.25,41.38 26.07,41.38 24.7,40 v1(24.7,37.5)
A13: length 20.2
  TOP w0.2: U10.28 39.7,40.07 39,39.38 25.4,39.38 23.9,37.88 U8.40
A14: length 35.1
  TOP w0.2: v1(23.1,37.5) U8.41 ; U10.3 v1(42.23,53)
  BOTTOM w0.2: v1(23.1,37.5) 23.1,40 24.98,41.88 39,41.88 41.62,44.5 41.62,52.39 v1(42.23,53)
A15: length 14.2
  TOP w0.2: U8.42 22.3,38.12 24.05,39.88 31.7,39.88 32.08,40.25 U10.22
CURRENT_SEN: length 64.5
  TOP w0.2: v1(22.3,21.75) U8.7 ; U22.7 4.9,71.5 R31.1 v1(1.88,71.5)
  BOTTOM w0.2: v1(1.88,71.5) 11,62.38 11,47.25 24.5,33.75 24.5,23.95 v1(22.3,21.75)
D0: length 43.5
  TOP w0.2: U10.13 29.54,56 28.41,57.12 25.12,57.12 24,56 24,48.38 23.25,47.62 14.18,47.62 12.55,46 U9.2 12.55,42 13.88,40.68 13.88,33.15 14.62,32.4 U8.51
D1: length 39.1
  TOP w0.2: U8.50 14.75,33.2 14.5,33.45 14.5,41.33 13.82,42 U9.3 13.82,45.88 15.07,47.12 23.5,47.12 24.5,48.12 24.5,55.88 25.25,56.62 27.52,56.62 28.27,55.88 U10.14
D2: length 34.5
  TOP w0.2: 27,54.65 27,55.75 26.62,56.12 25.38,56.12 25,55.75 25,47.88 23.75,46.62 15.97,46.62 15.1,45.75 U9.4 15.1,34 U8.49
D3: length 21.6
  TOP w0.2: v1(16.36,45) U9.5 16.36,41.75 17.5,40.62 U8.48 ; U10.17 v1(25.73,43)
  BOTTOM w0.2: v1(16.36,45) 18.36,43 v1(25.73,43)
D4: length 21.4
  TOP w0.2: 27,41.35 v1(27,43) ; U8.47 18.3,41.09 17.64,41.75 U9.6 v1(17.64,45)
  BOTTOM w0.2: v1(27,43) 26.5,43.5 19.14,43.5 v1(17.64,45)
D5: length 21.2
  TOP w0.2: U10.19 v1(28.27,43) ; U8.46 19.1,41.55 18.91,41.75 U9.7 v1(18.91,45)
  BOTTOM w0.2: v1(28.27,43) 27.27,44 19.91,44 v1(18.91,45)
D6: length 21.3
  TOP w0.2: U10.20 v1(29.54,43) ; v1(20.18,45) U9.8 20.18,41.75 19.9,41.48 U8.45
  BOTTOM w0.2: v1(20.18,45) 20.68,44.5 28.04,44.5 v1(29.54,43)
D7: length 21.4
  TOP w0.2: v1(21.45,45) U9.9 21.45,41.75 20.7,41.01 U8.44 ; U10.21 v1(30.8,43)
  BOTTOM w0.2: v1(21.45,45) 28.8,45 v1(30.8,43)
PLC_EN: length 73
  TOP w0.2: v1(56.62,61.5) 56.62,61.48 U3.3 ; U8.6 v1(21.5,21.75)
  BOTTOM w0.2: v1(56.62,61.5) 56.62,59.88 55.25,58.5 49,58.5 47,56.5 47,37 45.75,35.75 33,35.75 31.5,34.25 27.5,34.25 26.25,33 26.25,23 24.5,21.25 22,21.25 v1(21.5,21.75)
PLC_RX: length 67.1
  TOP w0.2: v1(23.1,21.75) U8.8 ; v1(1.88,74) R32.1 4.9,74 U22.6
  BOTTOM w0.2: v1(1.88,74) 1.88,72.25 11.5,62.62 11.5,47.5 25,34 25,23.65 v1(23.1,21.75)
PLC_TX: length 72.2
  TOP w0.2: U8.9 v1(23.9,21.75) ; v1(56.62,64.02) U3.2
  BOTTOM w0.2: v1(56.62,64.02) 56,63.4 56,60 55,59 48.75,59 46.5,56.75 46.5,37.25 45.5,36.25 32.75,36.25 31.25,34.75 27.25,34.75 25.75,33.25 25.75,23.25 24.25,21.75 v1(23.9,21.75)
RESERVED0: length 31.6
  TOP w0.2: U8.26 30,29.2 27.82,31.38 v1(23.25,31.38)
  BOTTOM w0.2: v1(23.25,31.38) 19.88,31.38 15.5,35.75 7.11,35.75 J9.1
RESERVED1: length 34.6
  TOP w0.2: v1(22.75,32) 22.75,31.12 23,30.88 27.52,30.88 30,28.4 U8.25
  BOTTOM w0.2: v1(22.75,32) 19.88,32 15.62,36.25 7.25,36.25 4.88,38.62 4.88,40.52 J9.2
RESERVED2: length 34.9
  TOP w0.2: v1(23.75,32) 29,32 29.4,32.4 U8.30
  BOTTOM w0.2: J9.3 5.38,42.56 5.38,38.75 7.38,36.75 15.75,36.75 20,32.5 23.25,32.5 v1(23.75,32)
RESERVED3: length 38.8
  TOP w0.2: v1(20.75,33) 20.75,22.8 20.7,22.75 U8.5
  BOTTOM w0.2: v1(20.75,33) 20.12,33 15.88,37.25 7.5,37.25 5.88,38.88 5.88,44.6 J9.4
RESERVED4: length 45.7
  TOP w0.2: U8.12 26.3,22.38 25.43,23.25 22.25,23.25 21.75,23.75 v1(21.75,33)
  BOTTOM w0.2: J9.5 6.38,46.65 6.38,39 7.62,37.75 16,37.75 20.25,33.5 21.25,33.5 v1(21.75,33)
RESERVED5: length 49.1
  TOP w0.2: U8.13 27.1,22.62 25.98,23.75 22.5,23.75 22.25,24 v1(22.25,33.88)
  BOTTOM w0.2: J9.6 6.88,48.69 6.88,39.12 7.75,38.25 16.12,38.25 20.5,33.88 v1(22.25,33.88)
RESERVED6: length 49.1
  TOP w0.2: U8.10 24.7,22.12 24.07,22.75 22.12,22.75 21.25,23.62 v1(21.25,34.38)
  BOTTOM w0.2: v1(21.25,34.38) 20.62,34.38 16.25,38.75 7.88,38.75 7.38,39.25 7.38,50.73 J9.7
RX: length 62.5
  TOP w0.2: R46.1 76.25,8.15 U27.6 v1(76.23,10) ; TH10.1 U8.27
  BOTTOM w0.2: TH10.1 34.25,29.25 34.25,20.5 36.5,18.25 65,18.25 73.25,10 v1(76.23,10)
SMPS24V: length 87.5
  TOP w0.7: 30.25,83.23 U4.10
  TOP w1: 82.5,85.5 C5.1 82.5,86.14 v1(79.62,86.14) v1(78.88,86.14) v1(78.12,86.14) ; TH4.1 R5.2
  TOP w2: TH4.1 34.5,83.25 35.98,84.73 J2.1 43.5,88.5 57.5,74.5 79.5,74.5 82.5,77.5 82.5,85.5
  BOTTOM w0.7: U1.5 v1(78.12,86.14) v1(78.88,86.14) v1(79.62,86.14)
TX: length 76.5
  TOP w0.2: U8.28 32.5,30.8 33.5,31.8 TH9.1 ; U29.3 v1(89.77,10)
  BOTTOM w0.2: TH9.1 34.75,31 34.75,20.75 36.75,18.75 65.25,18.75 73.5,10.5 89.27,10.5 v1(89.77,10)
UART_RX: length 80.3
  TOP w0.2: U27.3 76.25,17.35 R58.1 v1(77.25,19.5) ; J7.5 84.16,58.75 TH12.1
  BOTTOM w0.2: J7.5 85.16,53 97.5,53 100,50.5 100,19.38 98.75,18.12 78.62,18.12 v1(77.25,19.5)
UART_TX: length 68.8
  TOP w0.2: R50.2 R57.2 v1(89.75,18.62) 89.75,17.35 U29.6 ; J7.4 81.62,58.75 TH11.1
  BOTTOM w0.2: J7.4 83.12,52.5 97.25,52.5 99.5,50.25 99.5,19.62 98.5,18.62 v1(89.75,18.62)
N09389: length 3.4
  TOP w1: TR1.6 31.88,66 D3.2
N09392: length 3.4
  TOP w1: TR1.4 31.88,61 D5.2
N35390: length 23.2
  TOP w0.2: v1(30.8,56.12) U10.12 ; U9.19 v1(12.55,51.25)
  BOTTOM w0.2: v1(30.8,56.12) 17.43,56.12 v1(12.55,51.25)
N35393: length 23.2
  TOP w0.2: U9.18 v1(13.82,51.25) ; v1(32.08,56.12) U10.11
  BOTTOM w0.2: v1(32.08,56.12) 31.57,55.62 18.2,55.62 v1(13.82,51.25)
N35399: length 23.2
  TOP w0.2: U9.17 v1(15.1,51.25) ; v1(33.34,56.12) U10.10
  BOTTOM w0.2: v1(33.34,56.12) 32.34,55.12 18.97,55.12 v1(15.1,51.25)
N35402: length 23.2
  TOP w0.2: U9.16 v1(16.36,51.25) ; v1(34.62,56.12) 34.62,56.12 U10.9
  BOTTOM w0.2: v1(16.36,51.25) 19.74,54.62 33.12,54.62 v1(34.62,56.12)
N35405: length 23.2
  TOP w0.2: U9.15 v1(17.64,51.25) ; v1(35.88,56.12) U10.8
  BOTTOM w0.2: v1(35.88,56.12) 33.88,54.12 20.51,54.12 v1(17.64,51.25)
N35408: length 23.2
  TOP w0.2: U9.14 v1(18.91,51.25) ; v1(37.16,56.12) U10.7
  BOTTOM w0.2: v1(37.16,56.12) 34.66,53.62 21.28,53.62 v1(18.91,51.25)
N35411: length 23.2
  TOP w0.2: v1(38.42,56.12) U10.6 ; U9.13 v1(20.18,51.25)
  BOTTOM w0.2: v1(38.42,56.12) 35.42,53.12 22.05,53.12 v1(20.18,51.25)
N35414: length 23.2
  TOP w0.2: U9.12 v1(21.45,51.25) ; v1(39.7,56.12) U10.5
  BOTTOM w0.2: v1(39.7,56.12) 36.2,52.62 22.82,52.62 v1(21.45,51.25)
N35443: length 21.7
  TOP w0.2: U9.11 v1(22.71,51.25) ; U8.43 21.5,38.38 23.75,40.62 23.75,45.62 25.75,47.62 v1(25.75,51)
  BOTTOM w0.2: v1(22.71,51.25) 22.96,51 v1(25.75,51)
N35464: length 17.9
  TOP w0.2: U8.31 32.5,33.2 32.75,33.45 32.75,35.5 33.12,35.88 37,35.88 40.25,39.12 43.01,39.12 43.51,39.62 U10.31
N38547: length 14.6
  TOP w0.2: U8.33 29.5,36.38 36.75,36.38 40.97,40.59 U10.29
N38727: length 11.5
  TOP w0.2: U10.24 v1(34.62,39.88) ; v1(34.62,36.88) 28.82,36.88 28.7,36.75 U8.34
  BOTTOM w0.2: v1(34.62,36.88) 34.62,39.88 v1(34.62,39.88)
N39169: length 30.1
  TOP w0.2: v1(31.2,35.75) U8.32 ; U10.2 v1(43.51,53)
  BOTTOM w0.2: v1(43.51,53) 42.88,52.37 42.88,44.25 39.55,40.92 32.12,40.92 31.2,40 v1(31.2,35.75)
N10844937: length 36.8
  TOP w0.5: 95,80 v1(94.5,80) v1(94.5,81) 95,81 ; 95,80 95,81 ; 95,80 v1(95.5,80) ; 95,81 v1(95.5,81) ; 95.5,80.5 v1(95.5,80) ; 95.5,80.5 FL1.2 ; 95.5,80.5 v1(95.5,81) ; v1(95.5,80) 96.75,80 FL1.2 ; v1(95.5,81) 96.75,81 FL1.2
  BOTTOM w0.5: 95,81 v1(94.5,81) v1(94.5,80) 95,80 ; 95,81 v1(95.5,81) v1(95.5,80) 95,80 ; 95,81 95,80
  BOTTOM w0.7: C2.1 81.25,84.86
  BOTTOM w1.3: 80.75,84.86 U1.6
  BOTTOM w2: 95,80.5 89.11,80.5 84.75,84.86 80.75,84.86
N10844940: length 66.5
  TOP w0.5: 95,84 v1(94.5,84) v1(94.5,83) 95,83 ; 95,84 95,83 ; 95,84 v1(95.5,84) ; FL2.2 95.5,83.5 ; FL2.2 96.75,83 v1(95.5,83) ; FL2.2 96.75,84 v1(95.5,84) ; 95.5,83.5 v1(95.5,84) ; 95.5,83.5 v1(95.5,83) ; 95,83 v1(95.5,83) ; v1(78.12,87.41) 77.12,87.41 76.62,86.91 76.62,77.5 75.75,76.62 61.62,76.62 60.75,77.5 v1(60.75,80.5)
  BOTTOM w0.5: 95,84 95,83 ; 95,84 v1(95.5,84) v1(95.5,83) 95,83 ; 95,84 v1(94.5,84) v1(94.5,83) 95,83 ; C4.1 v1(60.75,80.5)
  BOTTOM w1.3: U1.4 v1(78.12,87.41) 80.75,87.41
  BOTTOM w2: 95,83.5 90.41,83.5 86.5,87.41 80.75,87.41
N10846204: length 30.2
  TOP w0.2: U2.4 73.25,62.75 73.5,63 v1(73.5,66.56) U2.1
  BOTTOM w0.2: U1.8 78.25,82.33 79.5,81.08 79.5,67.56 78.5,66.56 v1(73.5,66.56)
N10847524: length 3.4
  BOTTOM w0.5: U1.7 78.25,83.59 78.84,83 C2.2
N10847531: length 2.9
  BOTTOM w0.5: U1.14 62.12,83.59 61.53,83 C4.2
N10852000: length 4.9
  TOP w0.5: U3.6 67.1,61.5 R1.1 69.25,61.48 U2.5
N10855610: length 27.8
  TOP w0.2: U2.2 v1(70.5,65.29)
  BOTTOM w0.2: v1(70.5,65.29) 63.21,65.29 61.75,66.75 61.75,82 62.08,82.33 U1.13
N10855613: length 40.9
  TOP w0.2: U2.6 v1(70.5,60.21) ; v1(59.5,80.5) v1(59.5,87.41)
  BOTTOM w0.2: v1(70.5,60.21) 70.5,63.5 69.5,64.5 63,64.5 61,66.5 61,79 v1(59.5,80.5) ; v1(59.5,87.41) U1.17
N10855616: length 2.8
  BOTTOM w0.5: C3.1 61.38,84.38 61.88,84.86 U1.15
N10857224: length 15.9
  TOP w0.7: 29,85.77 29,95.25 L4.1
  TOP w1: D1.2 29.3,85.77 U4.12
N10865568: length 4.9
  TOP w0.5: U3.7 67.1,64 R2.1 69.25,64.02 U2.3
N10867072: length 2
  TOP w0.2: U3.1 57.9,66.5 R3.1
N10870573: length 2.8
  TOP w0.7: U6.1 20.91,66.04 21.25,66.04
  TOP w1.2: 21.25,66.04 TR1.1
N10870576: length 2.8
  TOP w0.7: U6.8 20.91,60.96 21.25,60.96
  TOP w1.2: 21.25,60.96 TR1.3
N10877738: length 12.1
  TOP w0.3: Y1.2 39.5,26 39,26.5 C14.2 35.2,26.8 U8.23
N10877750: length 12.2
  TOP w0.3: U8.24 35.1,27.6 C15.2 39,28 39.5,28.5 Y1.1
N10878472: length 54.8
  TOP w0.2: J5.5 2,30.06 2,19 3.5,17.5 33,17.5 34,18.5 R13.1 33.25,22.12 32.88,22.5 32.88,24.02 32.5,24.4 U8.20
N10878665: length 35.9
  TOP w0.2: U8.11 25.5,18.75 24.75,18 3.75,18 2.5,19.25 2.5,28.02 J5.4
N10882240: length 3.4
  TOP w1: TR3.4 62.5,40.87 D8.2
N10882308: length 2.8
  TOP w0.7: U19.8 62.46,51.84 62.46,51.5
  TOP w1.2: 62.46,51.5 TR3.3
N10882312: length 3.4
  TOP w1: D7.2 67.5,40.87 TR3.6
N10882400: length 2.8
  TOP w0.7: 67.54,51.5 67.54,51.84 U19.1
  TOP w1.2: 67.54,51.5 TR3.1
N10895652: length 7.1
  TOP w0.2: U14.4 87.16,45.84 R24.2 89.75,41.1 U16.6
N10895660: length 16.6
  TOP w0.2: U13.3 76.23,46.88 79,49.66 U14.1
N10895700: length 2.2
  TOP w0.2: U13.2 78.75,41.1 R18.1
N10895720: length 23.9
  TOP w0.2: U14.2 84.89,48.38 84.25,47.75 ; 84.25,47.75 R22.1 ; 84.25,47.75 84.89,47.12 U14.3 87.25,47.12 89.99,44.38 100.38,44.38 100.75,44 R15.2 100.75,41.1 U12.6
N10895736: length 2.2
  TOP w0.2: R23.1 87.25,31.9 U16.2
N10895740: length 17.3
  TOP w0.2: v1(102.25,48) U15.3 R25.2
  BOTTOM w0.2: v1(102.25,48) 103.25,47 116,47 J8.3
N10895768: length 5.9
  TOP w0.2: U14.6 93.5,47.12 R17.1 R20.1 FL4.2
N10895776: length 28.6
  TOP w0.2: FL3.1 98.67,48.95 U15.1 109.75,48.95 113.5,52.7 113.5,61.38 J8.1
N10895804: length 22.7
  TOP w0.2: FL4.1 98.67,47.05 U15.2 110.5,47.05 116,52.55 J8.2
N10895892: length 2.2
  TOP w0.2: U12.2 98.25,31.9 R16.1
N10899790: length 80.1
  TOP w0.2: U12.3 100.77,30.98 v1(102,29.75) ; v1(49,12.04) U11.2
  BOTTOM w0.2: v1(102,29.75) 101,28.75 101,10.5 98,7.5 51.75,7.5 49,10.25 v1(49,12.04)
N10905190: length 37.3
  TOP w0.2: v1(27.9,18.75) U8.14
  BOTTOM w0.2: v1(27.9,18.75) 28.9,19.75 31.25,19.75 33.75,17.25 60.61,17.25 J6.2
N10905845: length 37.6
  TOP w0.2: v1(28.7,18.75) U8.15
  BOTTOM w0.2: v1(28.7,18.75) 29.2,19.25 31,19.25 33.5,16.75 57.25,16.75 57.88,16.12 57.88,15.25 58.25,14.88 60.45,14.88 J6.4
N10905855: length 38.5
  TOP w0.2: v1(29.5,18.75) U8.16
  BOTTOM w0.2: J6.6 60.41,12.38 58.25,12.38 57.38,13.25 57.38,15.88 57,16.25 33.25,16.25 30.75,18.75 v1(29.5,18.75)
N10912524: length 16
  TOP w0.2: U8.60 14.45,25.2 v1(13,23.75) R12.2
  BOTTOM w0.2: v1(13,23.75) 12.5,23.25 12.5,16.78 J4.3
N10912530: length 20.1
  TOP w0.2: R11.2 v1(13,25) 14,26 U8.59
  BOTTOM w0.2: v1(13,25) 12,24 12,14.74 J4.5
N10912536: length 24.1
  TOP w0.2: R10.2 v1(13,26.25) 13.55,26.8 U8.58
  BOTTOM w0.2: J4.7 11.5,12.7 11.5,24.75 v1(13,26.25)
N10912542: length 28.1
  TOP w0.2: U8.57 13.1,27.6 v1(13,27.5) R9.2
  BOTTOM w0.2: J4.9 11,10.66 11,25.5 v1(13,27.5)
N10912548: length 28.8
  TOP w0.2: R8.2 v1(13,28.75) 13.35,28.4 U8.56
  BOTTOM w0.2: v1(13,28.75) 13.75,28 13.75,19.88 16.62,17 16.62,7.58 J4.10
N10912554: length 27.7
  TOP w0.2: U8.55 13.8,29.2 v1(13,30) R7.2
  BOTTOM w0.2: v1(13,30) 14.25,28.75 14.25,20.12 17.12,17.25 17.12,9.62 J4.8
N10912561: length 28.2
  TOP w0.2: R6.2 v1(13,31.25) 14.25,30 U8.54
  BOTTOM w0.2: v1(13,31.25) 14.75,29.5 14.75,20.38 17.5,17.62 18.75,17.62 19.25,17.12 19.25,12.13 J4.6
N10952342: length 2
  TOP w0.2: R4.1 57.9,59 U3.4
N11012209: length 16
  TOP w0.2: v1(27.75,72.12) 27.75,72.11 U21.7 ; U22.3 v1(15.38,74.02)
  BOTTOM w0.2: v1(15.38,74.02) 17.27,72.12 v1(27.75,72.12)
N11012213: length 2.2
  TOP w0.2: U22.4 16.25,76.56 R29.1
N11012385: length 2.2
  TOP w0.2: U22.1 16.25,68.94 R30.1
N11012421: length 17.5
  TOP w0.2: U22.2 v1(15.38,71.48) ; v1(29.75,70.84) U21.1
  BOTTOM w0.2: v1(29.75,70.84) 29.11,71.48 v1(15.38,71.48)
N11012477: length 3.7
  TOP w0.2: 33.75,73.39 R33.1 ; 33.75,73.39 R34.2 ; 33.75,73.39 U21.3
N11012557: length 58.7
  TOP w0.2: R36.1 v1(24.5,73.38) 26.17,73.38 U21.6 ; v1(36.25,70.12) R28.2
  TOP w1: R26.2 R27.2 R59.2
  BOTTOM w0.2: R59.2 47,70.12 v1(36.25,70.12) 33,73.38 v1(24.5,73.38)
  BOTTOM w0.7: U1.16 61.5,86.14
  BOTTOM w1: R27.2 58,86.14 61.5,86.14
N11012561: length 4.9
  TOP w0.2: C31.2 R37.1 23.25,74.66 U21.5
N11012633: length 2.8
  TOP w0.2: R37.2 R36.2 R35.1
N11012693: length 4.4
  TOP w0.5: R28.1 C32.2 33.75,72.11 U21.2
N11053368: length 55.9
  TOP w0.2: U11.4 v1(49,9.5) ; v1(100.77,6.75) U31.3
  BOTTOM w0.2: v1(49,9.5) 51.5,7 100.5,7 100.76,6.74 v1(100.77,6.75)
N11053516: length 23.9
  TOP w0.2: U28.2 84.89,24.64 84.25,24 ; 84.25,24 84.89,23.36 U28.3 87.25,23.36 89.99,20.62 100.38,20.62 100.75,20.25 R53.2 100.75,17.35 U31.6 ; 84.25,24 R48.1
N11053708: length 2.2
  TOP w0.2: R45.1 78.75,17.35 U27.2
N11053936: length 2.2
  TOP w0.2: U29.2 87.25,8.15 R49.1
N11054044: length 2.2
  TOP w0.2: R54.1 98.25,8.15 U31.2
N11062693: length 3.4
  TOP w1: D10.2 51.25,40.87 TR5.4
N11062785: length 3.4
  TOP w1: D9.2 56.25,40.87 TR5.6
N11062789: length 2.8
  TOP w0.7: U23.8 51.21,51.84 51.21,51.5
  TOP w1.2: 51.21,51.5 TR5.3
N11062917: length 2.8
  TOP w0.7: 56.29,51.5 56.29,51.84 U23.1
  TOP w1.2: 56.29,51.5 TR5.1
N11075966: length 23.5
  TOP w0.2: FL5.1 98.67,25.2 U30.1 112.5,25.2 116,28.7 J11.1
N11075998: length 19.5
  TOP w0.2: R55.2 U30.3 v1(102.25,24.25)
  BOTTOM w0.2: v1(102.25,24.25) 109.6,16.9 J11.3
N11076018: length 5.9
  TOP w0.2: U28.6 93.5,23.36 R47.2 R39.1 FL6.2
N11076244: length 18.1
  TOP w0.2: J11.2 114.15,23.3 U30.2 98.67,23.3 FL6.1
N11076282: length 6.4
  TOP w0.2: FL5.2 96.83,24.75 R39.2 R51.2 93.5,24.64 U28.7

## Copper pours and planes (outline as drawn; the poured copper is in the pictures)
5VL1 on TOP (solid shape): 51,63.75 51,60.5 50.75,60.25 48.75,60.25 48.5,60.5 48.5,61.75 48.25,62 46.25,62 46.25,64 50.75,64
5VL1 on TOP (solid shape): 51,63.75 51,60.5 50.75,60.25 48.75,60.25 48.5,60.5 48.5,61.75 48.25,62 46.28,62 46.25,62.03 46.25,63.97 46.28,64 50.75,64
5VL1 on BOTTOM (solid shape): 51,62.5 51,60.5 50.75,60.25 48.75,60.25 48.5,60.5 48.5,62.5 48.75,62.75 50.75,62.75
5VL1 on BOTTOM (solid shape): 51,62.5 51,60.5 50.75,60.25 48.75,60.25 48.5,60.5 48.5,62.5 48.75,62.75 50.75,62.75
5VL1 on SIGNAL_3 (solid shape): 12,55.5 28,55.5 28,75.75 56.5,75.75 56.5,59.75 45.25,59.75 45.25,50.25 64.25,50.25 64.25,27.25 52.75,27.25 52.75,0 0,0 0,77.5 12,77.5
5VL1 on SIGNAL_3 (solid shape): outline of 1747 points within 0.5,0.5 64.25,77.5
5VL2 on TOP (solid shape): 55.5,24.25 56.75,24.25 57,24 57,22 56.75,21.75 53.5,21.75 53.25,22 53.25,26.5 55.5,26.5
5VL2 on TOP (solid shape): 55.5,26.47 55.5,24.25 56.75,24.25 57,24 57,22 56.75,21.75 53.5,21.75 53.25,22 53.25,26.47 53.28,26.5 55.47,26.5
5VL2 on BOTTOM (solid shape): 57,24 57,22 56.75,21.75 54.75,21.75 54.5,22 54.5,24 54.75,24.25 56.75,24.25
5VL2 on BOTTOM (solid shape): 57,24 57,22 56.75,21.75 54.75,21.75 54.5,22 54.5,24 54.75,24.25 56.75,24.25
5VL2 on SIGNAL_3 (solid shape): 123.5,0 53.25,0 53.25,26.75 64.25,26.75 64.25,20.25 77.5,20.25 77.5,31.25 123.5,31.25
5VL2 on SIGNAL_3 (solid shape): outline of 605 points within 53.25,0.5 123,31.25
5VL3 on TOP (solid shape): 66.75,24.25 68,24.25 68.25,24 68.25,22 68,21.75 64.75,21.75 64.5,22 64.5,26.5 66.75,26.5
5VL3 on TOP (solid shape): 66.75,26.47 66.75,24.25 68,24.25 68.25,24 68.25,22 68,21.75 64.75,21.75 64.5,22 64.5,26.47 64.53,26.5 66.72,26.5
5VL3 on BOTTOM (solid shape): 68.25,24 68.25,22 68,21.75 66,21.75 65.75,22 65.75,24 66,24.25 68,24.25
5VL3 on BOTTOM (solid shape): 68.25,24 68.25,22 68,21.75 66,21.75 65.75,22 65.75,24 66,24.25 68,24.25
5VL3 on SIGNAL_3 (solid shape): 123.5,31.75 77,31.75 77,20.75 64.75,20.75 64.75,50.25 76.75,50.25 76.75,52.5 123.5,52.5
5VL3 on SIGNAL_3 (solid shape): outline of 212 points within 64.75,20.75 123,52.5
5VM on TOP (solid shape): 18.62,93.5 16,93.5 15,92.5 15,85.5 14.75,85.25 12.62,85.25 10.75,87.12 8.88,87.12 8.88,91 14.88,97 18.62,97
5VM on TOP (solid shape): 18.62,96.97 18.62,93.53 18.6,93.5 16,93.5 15,92.5 15,85.5 14.75,85.25 12.63,85.25 10.75,87.12 8.9,87.12 8.88,87.15 8.88,91 14.86,96.99 14.88,97 18.6,97
5VM on BOTTOM (solid shape): 13.5,91 13.5,87.5 13.25,87.25 10.5,87.25 10.25,87.5 10.25,91 10.5,91.25 13.25,91.25
5VM on BOTTOM (solid shape): 13.5,91 13.5,87.5 13.25,87.25 10.5,87.25 10.25,87.5 10.25,91 10.5,91.25 13.25,91.25
5VM on SIGNAL_3 (solid shape): 123.5,53 76.25,53 76.25,50.75 45.75,50.75 45.75,59.25 57,59.25 57,76.25 27.25,76.25 27.25,56 12.5,56 12.5,78 0,78 0,103.5 123.5,103.5
5VM on SIGNAL_3 (solid shape): outline of 2918 points within 0.5,50.75 123,103
0 on BOTTOM (solid shape): 81.5,92.25 75,92.25 75,77.5 65,77.5 65,92.25 58.5,92.25 58.5,103.5 81.5,103.5
0 on BOTTOM (solid shape): 81.5,102.97 81.5,92.28 81.47,92.25 75,92.25 75,77.53 74.97,77.5 65.03,77.5 65,77.53 65,92.25 58.53,92.25 58.5,92.28 58.5,102.97 58.53,103 81.47,103
0 on SIGNAL_2 (solid shape): 123.5,59.25 71.75,59.25 71.75,47.5 47,47.5 47,57.25 56,57.25 56,69.5 22.75,69.5 22.75,56.75 12.5,56.75 12.5,78 0,78 0,103.5 123.5,103.5
